# Altium PCB PCB1.PcbDoc (part 1 of 4)
Units mm, origin at the board's own origin, x right, y up, seen from the top; angles counter-clockwise.
Board outline 100.03 x 99.98 mm, 4 copper layers (Top Layer, Layer 2, Layer 3, Bottom Layer), stack 0.603 mm thick; 139 components, 135 nets, 1369 pads, 401 vias.
Unrouted connection lines stored in the file: 1.
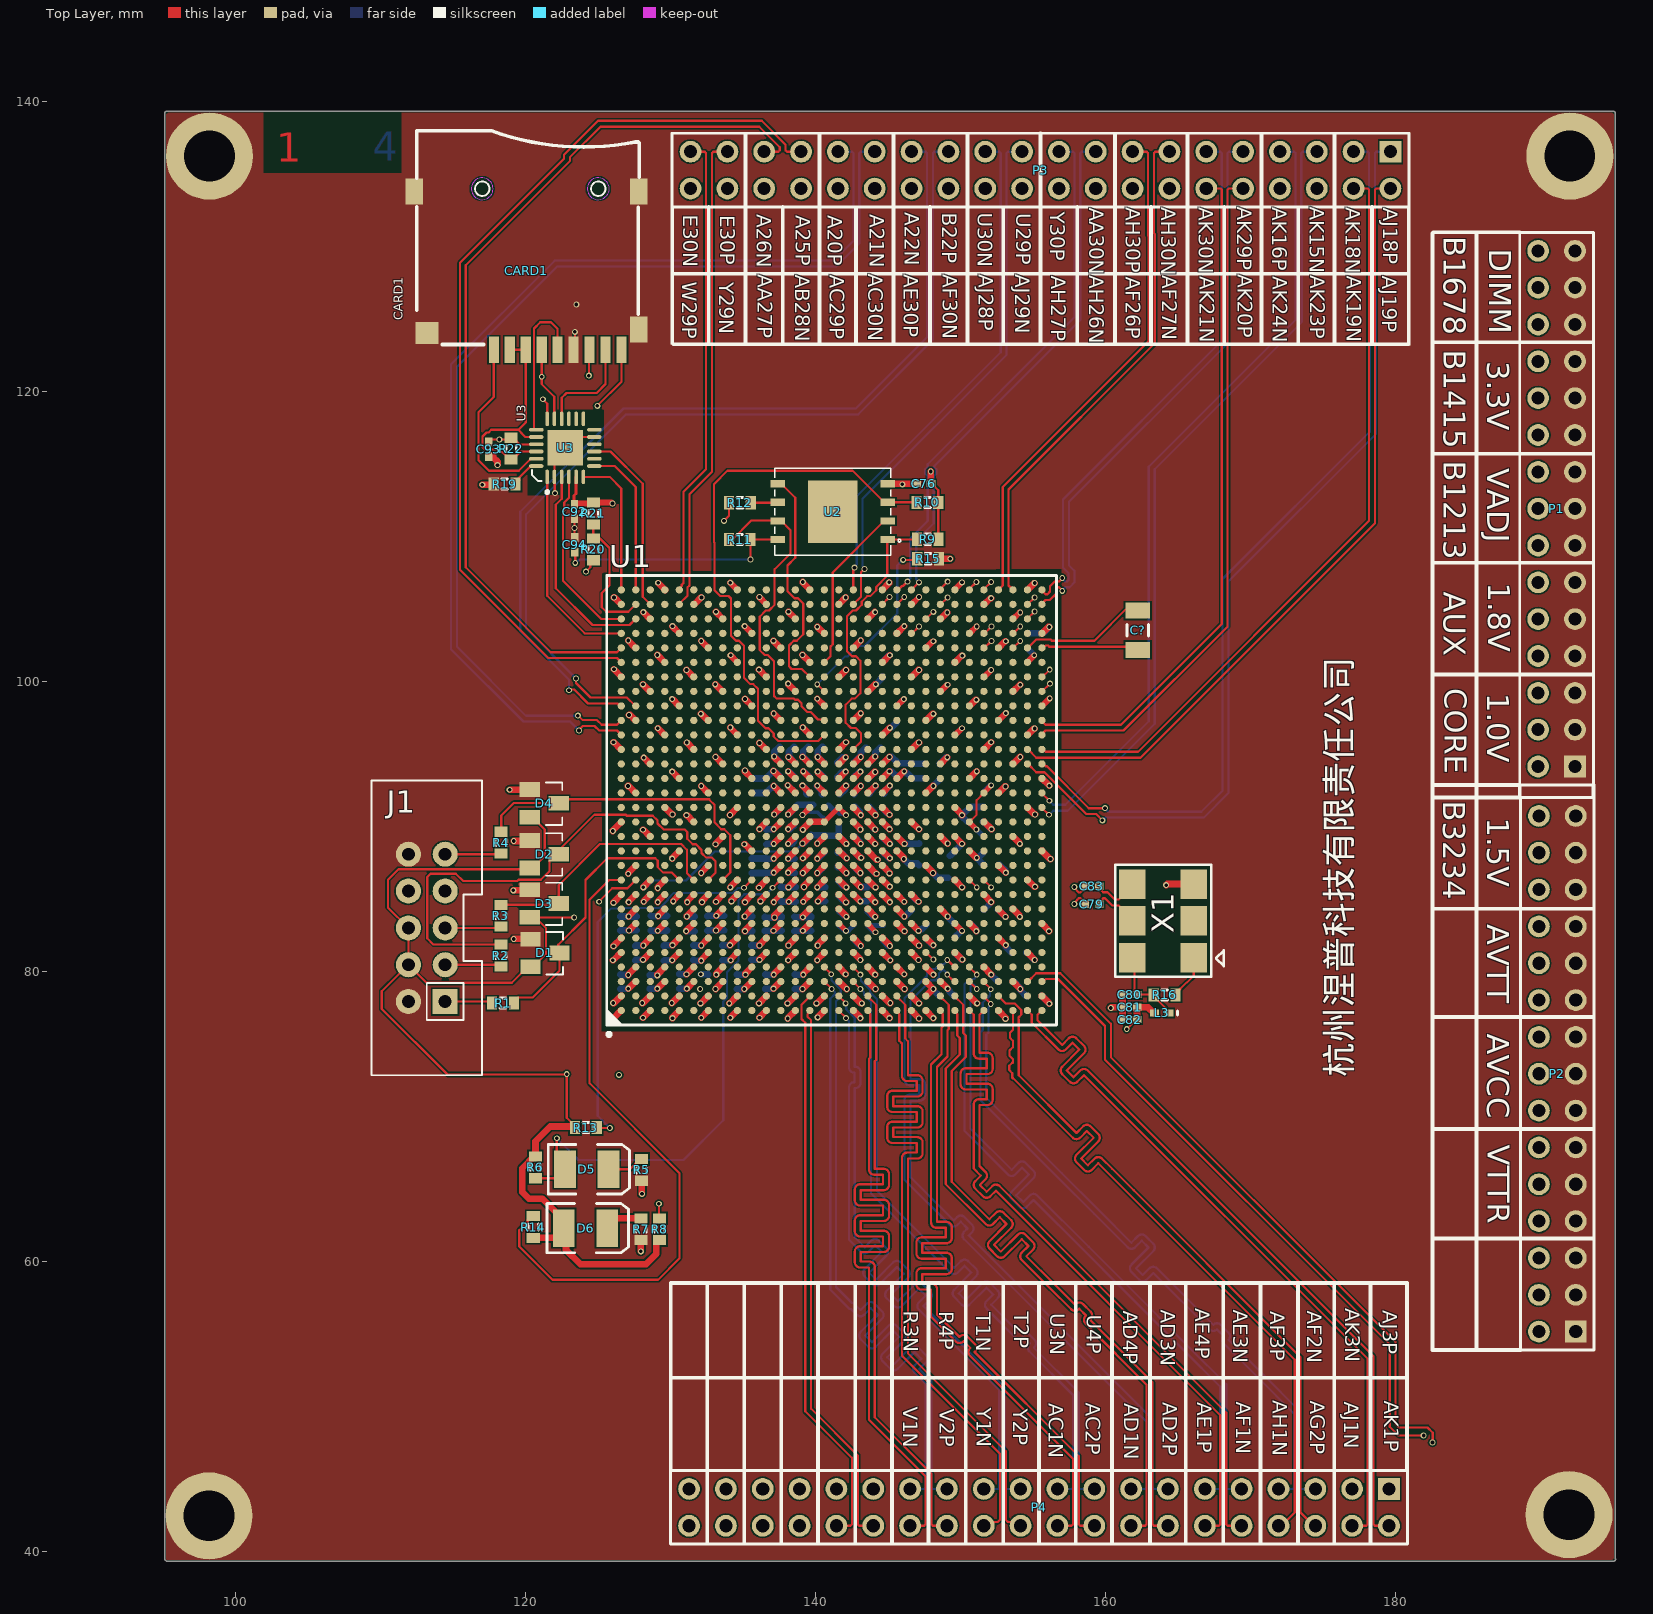
[diagram p0: Top Layer view]
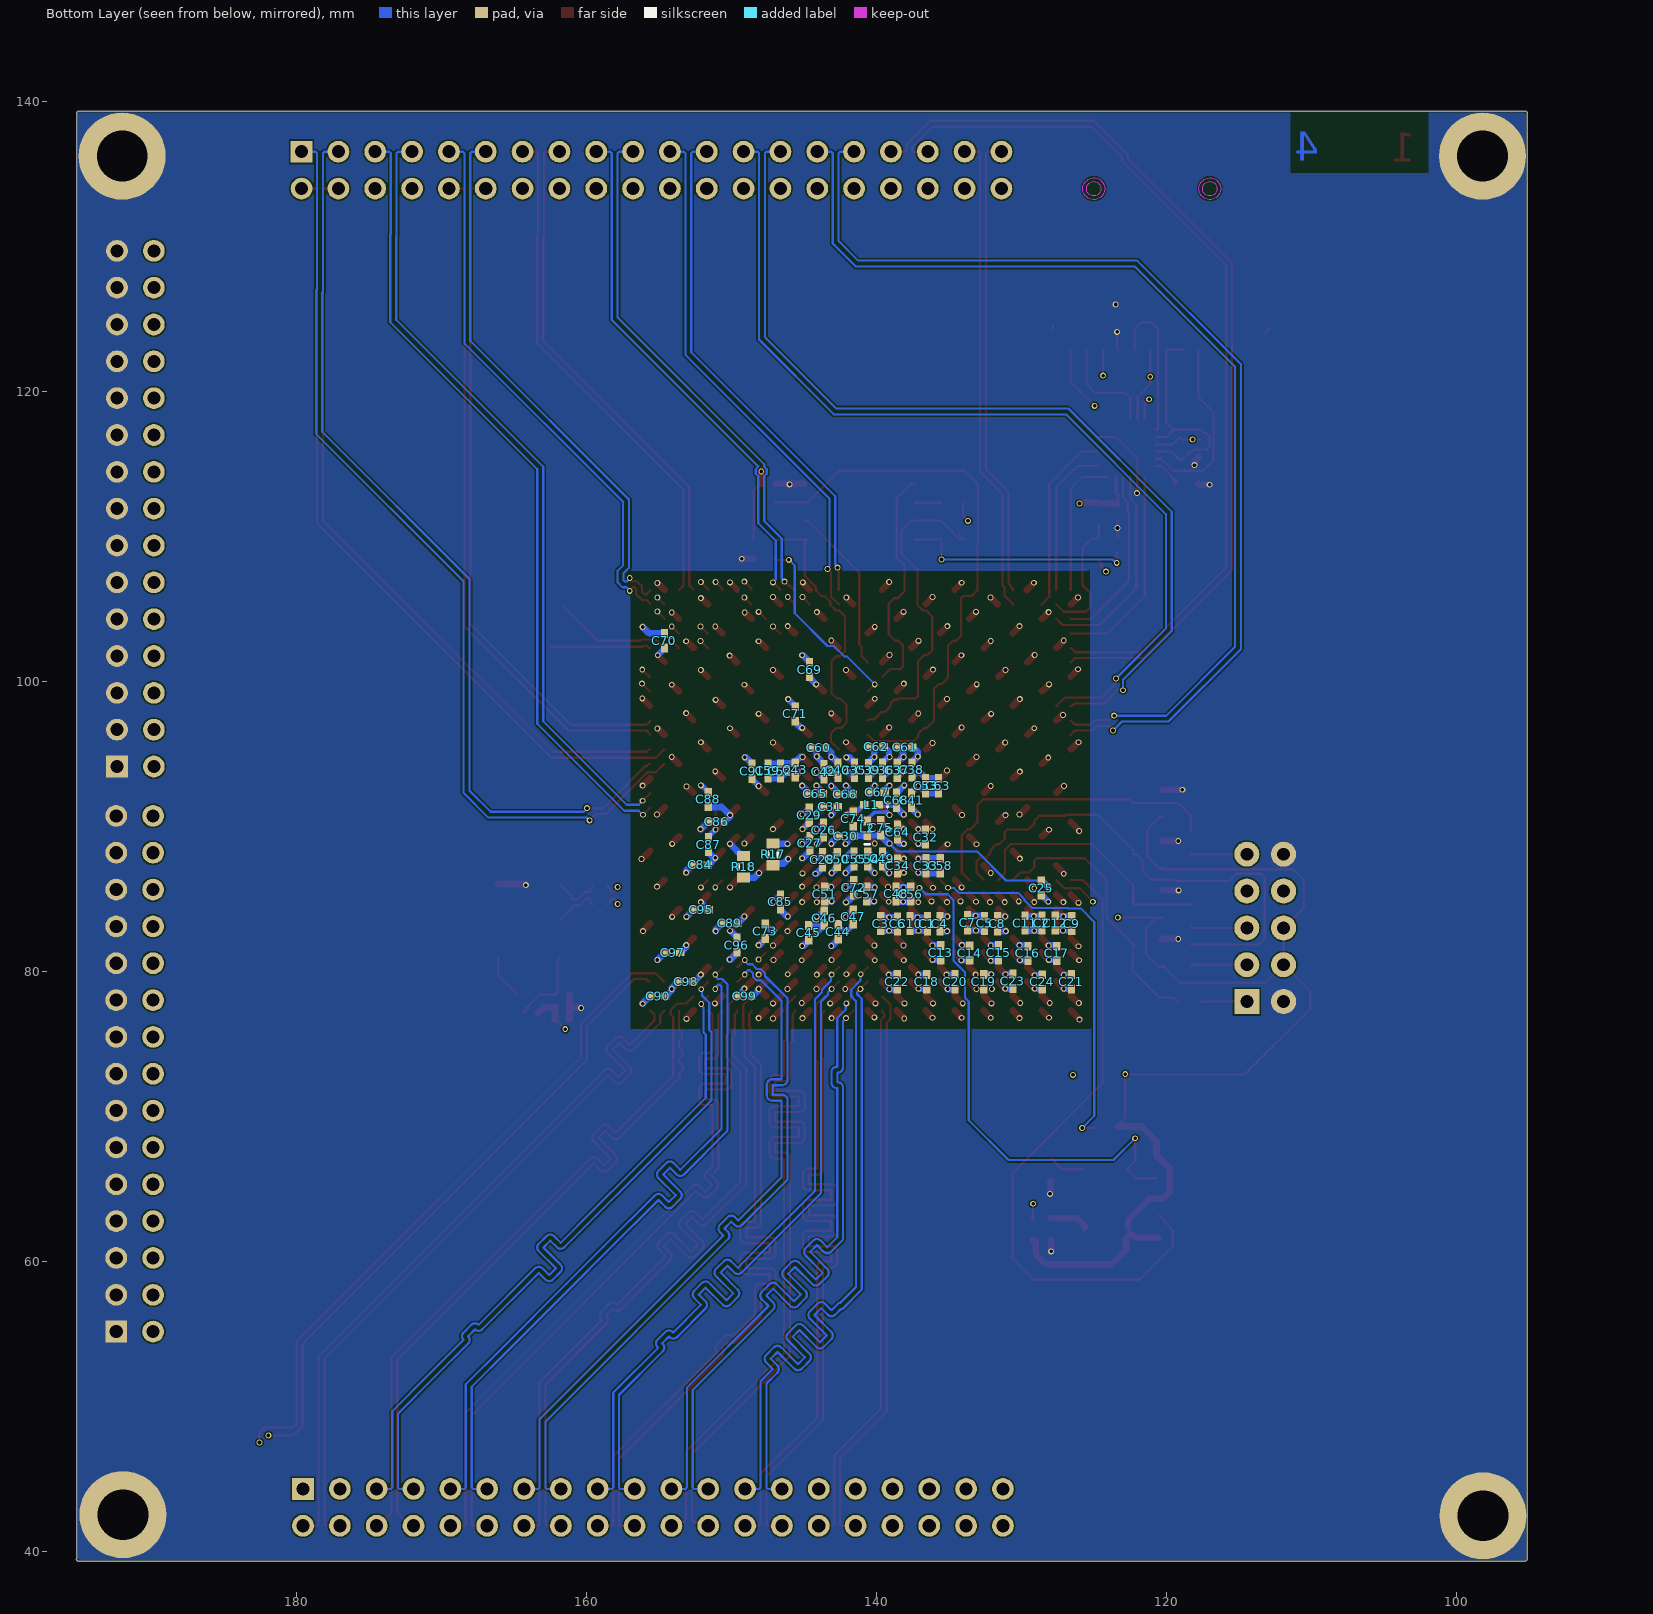
[diagram p1: Bottom Layer view, seen from below]
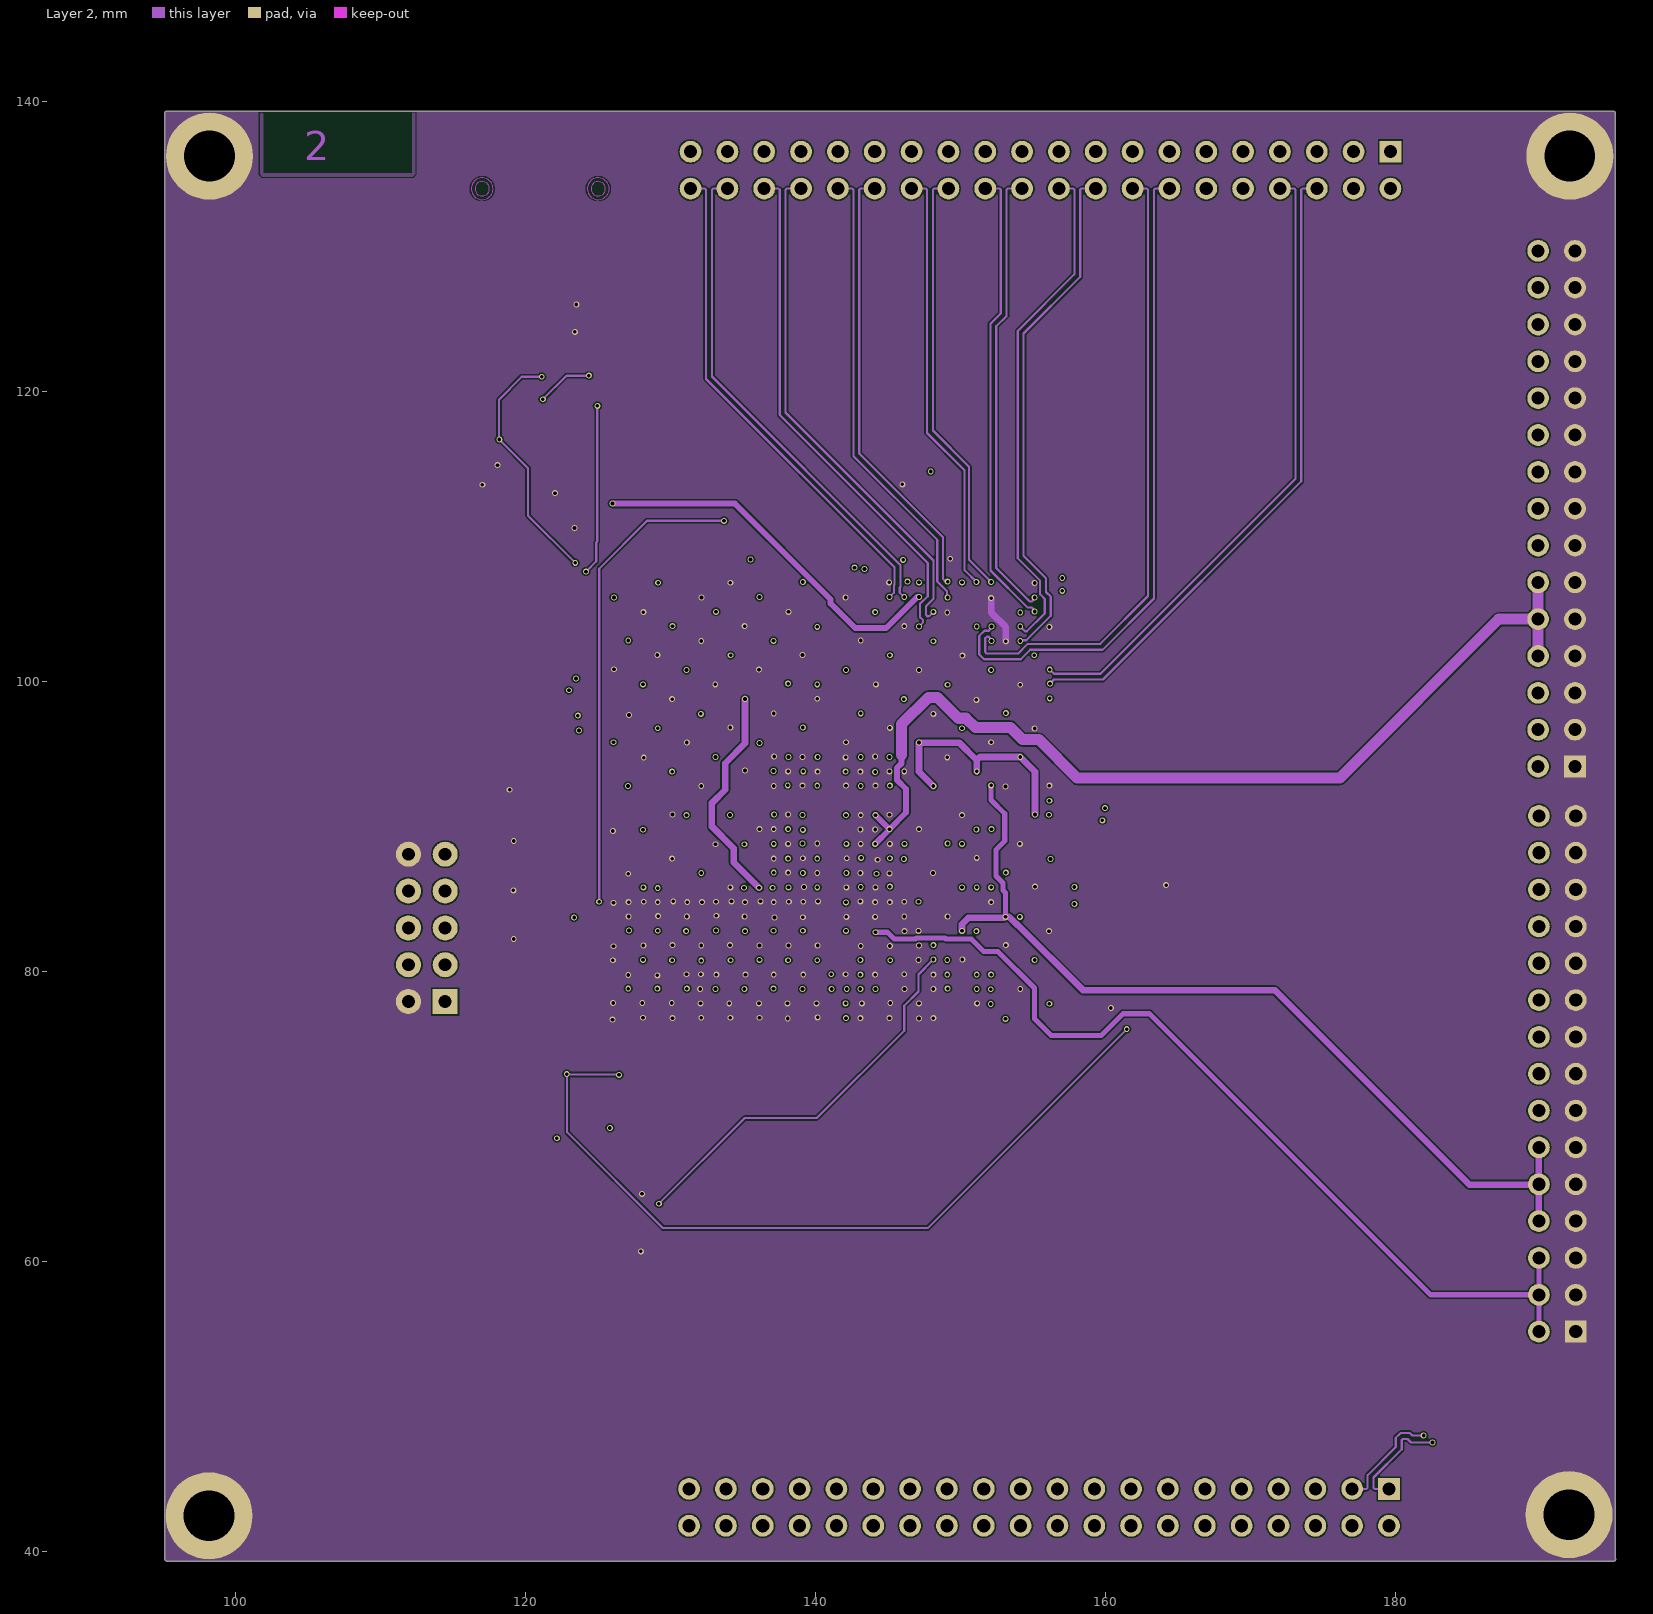
[diagram p2: Layer 2]
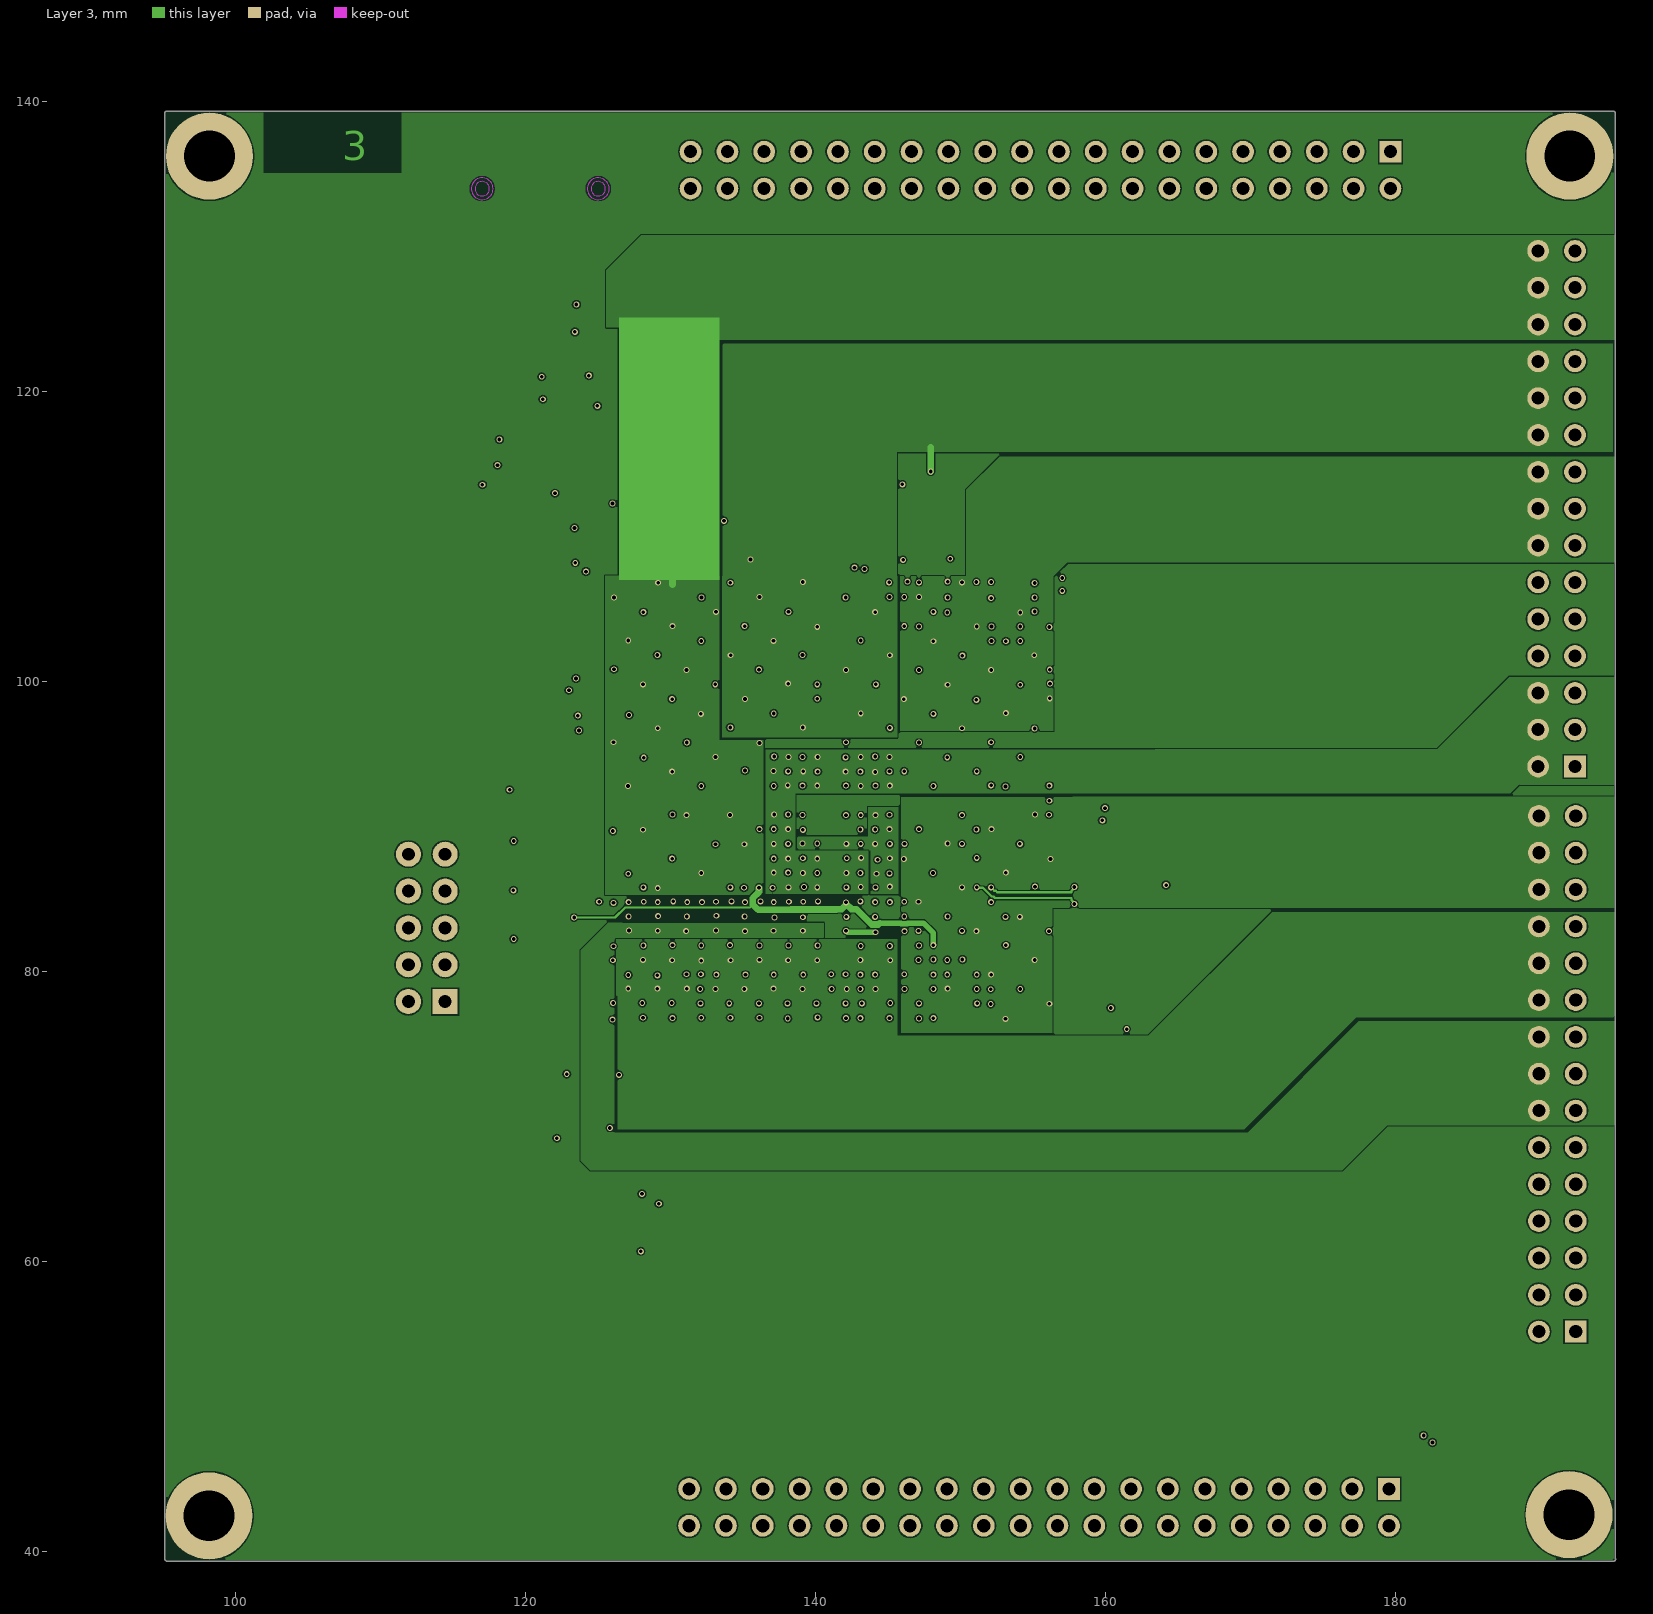
[diagram p3: Layer 3]

## Layer stack, top to bottom
Top Solder: solder mask 0.0102, Solder Resist, Dk 3.5
Top Layer: signal copper 0.0356
Dielectric 2: prepreg 0.0711, PP-006, Dk 4.1
Layer 2: signal copper 0.035
Dielectric 1: dielectric 0.32, FR-4, Dk 4.8
Layer 3: signal copper 0.035
Dielectric 3: prepreg 0.0711, PP-006, Dk 4.1
Bottom Layer: signal copper 0.0356
Bottom Solder: solder mask 0.0102, Solder Resist, Dk 3.5

## Board outline
95.148,39.497 ccw(c95.275,39.497) 95.199,39.395 ccw(c95.301,39.472) 95.301,39.344 195.047,39.344 ccw(c195.047,39.472) 195.174,39.472 ccw(c195.047,39.472) 195.149,39.548 195.149,139.192 ccw(c195.021,139.192) 195.021,139.319 95.275,139.319 ccw(c95.275,139.192) 95.148,139.192

## Design rules (kind name [scope] priority, off if disabled: settings)
Clearance Clearance_1 [All] p1: gap=0.102 ignorepadtopadclearanceinfootprint=TRUE
Clearance [All] p2: gap=0.102 ignorepadtopadclearanceinfootprint=TRUE
DiffPairsRouting [All] p1: maxlimit=0.254 minlimit=0.254 mostfreqgap=0.254 toplayer_minwidth=0.152 toplayer_maxwidth=0.381 toplayer_prefwidth=0.381 midlayer1_minwidth=0.152 midlayer1_maxwidth=0.381 midlayer1_prefwidth=0.381 midlayer2_minwidth=0.152 midlayer2_maxwidth=0.381 midlayer2_prefwidth=0.381 bottomlayer_minwidth=0.152 bottomlayer_maxwidth=0.381 bottomlayer_prefwidth=0.381 maxuncoupledlength=12.7
FanoutControl Fanout_BGA [All] p1: bgadir=Out bgaviamode=Centered fanoutstyle=Auto fanoutdirection=Alternating viagrid=0.025 // Fanout_BGA (Default Rule)
HoleToHoleClearance [All] p1: gap=0.102 allowstackedmicrovias=TRUE
MinimumSolderMaskSliver [All] p1: minsoldermaskwidth=0.102
PlaneClearance [All] p1: clearance=0.102
PlaneConnect [All] p1: planeconnectstyle=Direct reliefexpansion=0.508 reliefentries=4 reliefconductorwidth=0.254 reliefairgap=0.254
PolygonConnect [All] p1: connectstyle=Direct reliefconductorwidth=0.254 reliefentries=4 polygonreliefangle="90 Angle" airgapwidth=0.254
RoomDefinition SD&UART&Sensor [InComponentClass('SD&UART&Sensor')] p1 off: confinementstyle=ConfineIn formatcopy=TRUE lockcomponents=FALSE outline 0,0 50.8,0 50.8,25.4 0,25.4
RoomDefinition "PAGE15 FLASH" [InComponentClass('PAGE15 FLASH')] p2 off: confinementstyle=ConfineIn formatcopy=TRUE lockcomponents=FALSE outline 0,0 50.8,0 50.8,25.4 0,25.4
RoomDefinition IO [InComponentClass('IO')] p3 off: confinementstyle=ConfineIn formatcopy=TRUE lockcomponents=FALSE outline 0,0 50.8,0 50.8,25.4 0,25.4
RoomDefinition INPUT [InComponentClass('INPUT')] p4 off: confinementstyle=ConfineIn formatcopy=TRUE lockcomponents=FALSE outline 0,0 50.8,0 50.8,25.4 0,25.4
RoomDefinition "FPGA Power" [InComponentClass('FPGA Power')] p5 off: confinementstyle=ConfineIn formatcopy=TRUE lockcomponents=FALSE outline 0,0 50.8,0 50.8,25.4 0,25.4
RoomDefinition CLOCK [InComponentClass('CLOCK')] p6 off: confinementstyle=ConfineIn formatcopy=TRUE lockcomponents=FALSE outline 0,0 50.8,0 50.8,25.4 0,25.4
RoomDefinition BANK34 [InComponentClass('BANK34')] p7 off: confinementstyle=ConfineIn formatcopy=TRUE lockcomponents=FALSE outline 0,0 50.8,0 50.8,25.4 0,25.4
RoomDefinition BANK32-33 [InComponentClass('BANK32-33')] p8 off: confinementstyle=ConfineIn formatcopy=TRUE lockcomponents=FALSE outline 0,0 50.8,0 50.8,25.4 0,25.4
RoomDefinition BANK14-15 [InComponentClass('BANK14-15')] p9 off: confinementstyle=ConfineIn formatcopy=TRUE lockcomponents=FALSE outline 0,0 50.8,0 50.8,25.4 0,25.4
RoomDefinition BANK12-13 [InComponentClass('BANK12-13')] p10 off: confinementstyle=ConfineIn formatcopy=TRUE lockcomponents=FALSE outline 0,0 50.8,0 50.8,25.4 0,25.4
RoomDefinition BANK0 [InComponentClass('BANK0')] p11 off: confinementstyle=ConfineIn formatcopy=TRUE lockcomponents=FALSE outline 0,0 50.8,0 50.8,25.4 0,25.4
RoutingCorners [All] p1: cornerstyle=45-Degree minsetback=0.102 maxsetback=2.54
RoutingVias [All] p1: holewidth=0.711 width=1.27 viastyle="Through Hole" minholewidth=0.102 minwidth=0.102 maxholewidth=2.54 maxwidth=2.54
SilkToSilkClearance [All] p1: silktosilkclearance=0.102
SilkToSolderMaskClearance [IsPad] p1: minsilkscreentomaskgap=0.102 clearancetoexposedcopper=TRUE
SolderMaskExpansion [All] p1: expansion=0.102
UnRoutedNet [All] p1: checkbadconnections=TRUE
Width [All] p1: maxlimit=2.54 minlimit=0.152 preferedwidth=0.152
20 further rules are at their usual default settings.

## Classes and differential pairs
component class BANK12-13: C?
component class BANK34: C95 C96 C97 C98 C99
component class SD&UART&Sensor: C92 C93 C94 CARD1 R19 R20 R21 R22 U3
component class BANK32-33: C84 C85 C86 C87 C88 C89 C90 C91 R17 R18
component class IO: P3 P4
component class INPUT: P1 P2
component class CLOCK: C79 C80 C81 C82 C83 L3 R16 X1
component class BANK14-15: R15
component class "PAGE15 FLASH": C76 R9 R10 R11 U2
component class "FPGA Power": C1 C2 C3 C4 C5 C6 C7 C8 C9 C10 C11 C12 C13 C14 C15 C16 C17 C18 C19 C20 C21 C22 C23 C24 C25 C26 C27 C28 C29 C30 C31 C32 C33 C34 C35 C36 C37 C38 C39 C40 C41 C42 C43 C44 C45 C46 C47 C48 C49 C50 C51 C52 C53 C54 C55 C56 C57 C58 C59 C60 C61 C62 C63 C64 C65 C66 C67 C68 C69 C70 C71 C72 C73 C74 C75 L2
component class BANK0: D1 D2 D3 D4 D5 D6 J1 L1 R1 R2 R3 R4 R5 R6 R7 R8 R12 R13 R14
differential pair M1: +"" -""
differential pair P1: +P1_P -P1_N
differential pair R3: +R3_P -R3_N
differential pair T1: +T1_P -T1_N
differential pair U3: +U3_P -U3_N
differential pair V1: +V1_P -V1_N
differential pair Y1: +Y1_P -Y1_N
differential pair AJ2: +AJ2_P -AJ2_N
differential pair AD3: +AD3_P -AD3_N
differential pair AK3: +AK3_P -AK3_N
differential pair AE3: +AE3_P -AE3_N
differential pair AF2: +AF2_P -AF2_N
differential pair AD1: +AD1_P -AD1_N
differential pair AC1: +AC1_P -AC1_N
differential pair AF1: +AF1_P -AF1_N
differential pair AH1: +AH1_P -AH1_N
differential pair AK1: +AK1_P -AK1_N
differential pair A21: +A21_P -A21_N
differential pair A22: +A22_P -A22_N
differential pair U30: +U30_P -U30_N
differential pair AK30: +AK30_P -AK30_N
differential pair A26: +A26_P -A26_N
differential pair E30: +E30_P -E30_N
differential pair AA30: +AA30_P -AA30_N
differential pair AH_30: +AH_30_P -AH_30_N
differential pair AK19: +AK19_P -AK19_N
differential pair AK18: +AK18_P -AK18_N
differential pair AK15: +AK15_P -AK15_N
differential pair X13: +X13_P -X13_N
differential pair X12: +X12_P -X12_N
differential pair X11: +X11_P -X11_N
differential pair X10: +X10_P -X10_N
differential pair X8: +X8_P -X8_N
differential pair X7: +X7_P -X7_N
differential pair X6: +X6_P -X6_N
differential pair X5: +X5_P -X5_N
differential pair X4: +X4_P -X4_N
differential pair X3: +X3_P -X3_N
differential pair X2: +X2_P -X2_N
differential pair X1: +X1_P -X1_N
differential pair SYS_CLK: +SYS_CLK_P -SYS_CLK_N

## Components (designator, comment, footprint, x,y, rotation, side; value= is the part's Value field where it differs from the comment)
C1 "Cap Semi" 0402 136.5,83.287 r90 bottom value=4.7uF
C2 "Cap Semi" 0402 128.6,83.337 r270 bottom value=4.7uF
C3 "Cap Semi" 0402 139.725,83.304 r270 bottom value=1uF
C4 "Cap Semi" 0402 135.636,83.287 r270 bottom value=1uF
C5 "Cap Semi" 0402 132.563,83.312 r270 bottom value=0.47uF
C6 "Cap Semi" 0402 138.557,83.279 r270 bottom value=0.47uF
C7 "Cap Semi" 0402 133.731,83.355 r270 bottom value=0.47uF
C8 "Cap Semi" 0402 131.674,83.287 r270 bottom value=0.47uF
C9 "Cap Semi" 0402 126.543,83.304 r270 bottom value=0.022uF
C10 "Cap Semi" 0402 137.693,83.304 r270 bottom value=0.022uF
C11 "Cap Semi" 0402 129.769,83.337 r270 bottom value=0.022uF
C12 "Cap Semi" 0402 127.686,83.337 r270 bottom value=0.022uF
C13 "Cap Semi" 0402 135.585,81.297 r90 bottom value=4.7uF
C14 "Cap Semi" 0402 133.579,81.272 r270 bottom value=4.7uF
C15 "Cap Semi" 0402 131.597,81.297 r270 bottom value=1uF
C16 "Cap Semi" 0402 129.565,81.247 r270 bottom value=1uF
C17 "Cap Semi" 0402 127.584,81.247 r270 bottom value=0.47uF
C18 "Cap Semi" 0402 136.55,79.291 r270 bottom value=0.47uF
C19 "Cap Semi" 0402 132.613,79.291 r270 bottom value=0.47uF
C20 "Cap Semi" 0402 134.595,79.291 r270 bottom value=0.47uF
C21 "Cap Semi" 0402 126.568,79.291 r270 bottom value=0.022uF
C22 "Cap Semi" 0402 138.582,79.291 r270 bottom value=0.022uF
C23 "Cap Semi" 0402 130.607,79.327 r270 bottom value=0.022uF
C24 "Cap Semi" 0402 128.575,79.281 r270 bottom value=0.022uF
C25 "Cap Semi" 0402 128.651,85.75 r90 bottom value=47uF
C26 "Cap Semi" 0402 143.662,89.756 r270 bottom value=47uF
C27 "Cap Semi" 0402 144.602,88.832 r270 bottom value=47uF
C28 "Cap Semi" 0402 143.739,87.706 r270 bottom value=4.7uF
C29 "Cap Semi" 0402 144.653,90.772 r270 bottom value=4.7uF
C30 "Cap Semi" 0402 142.121,89.332 r180 bottom value=47uF
C31 "Cap Semi" 0402 143.188,91.364 r0 bottom value=4.7uF
C32 "Cap Semi" 0402 136.627,89.273 r270 bottom value=100uF
C33 "Cap Semi" 0402 136.601,87.292 r270 bottom value=100uF
C34 "Cap Semi" 0402 138.557,87.274 r90 bottom value=100uF
C35 "Cap Semi" 0402 141.529,93.878 r270 bottom value=4.7uF
C36 "Cap Semi" 0402 139.598,93.87 r270 bottom value=4.7uF
C37 "Cap Semi" 0402 138.582,93.878 r90 bottom value=4.7uF
C38 "Cap Semi" 0402 137.566,93.896 r270 bottom value=4.7uF
C39 "Cap Semi" 0402 140.564,93.861 r90 bottom value=4.7uF
C40 "Cap Semi" 0402 142.672,93.87 r90 bottom value=4.7uF
C41 "Cap Semi" 0402 137.592,91.804 r270 bottom value=4.7uF
C42 "Cap Semi" 0402 143.637,93.777 r270 bottom value=4.7uF
C43 "Cap Semi" 0402 145.618,93.896 r90 bottom value=4.7uF
C44 "Cap Semi" 0402 142.646,82.736 r90 bottom value=4.7uF
C45 "Cap Semi" 0402 144.678,82.669 r90 bottom value=4.7uF
C46 "Cap Semi" 0402 143.612,83.685 r270 bottom value=4.7uF
C47 "Cap Semi" 0402 141.605,83.761 r270 bottom value=4.7uF
C48 "Cap Semi" 0402 138.659,85.344 r90 bottom value=100uF
C49 "Cap Semi" 0402 139.598,87.757 r270 bottom value=100uF
C50 "Cap Semi" 0402 142.723,87.732 r90 bottom value=100uF
C51 "Cap Semi" 0402 143.586,85.336 r90 bottom value=100uF
C52 "Cap Semi" 0402 146.634,93.82 r90 bottom value=100uF
C53 "Cap Semi" 0402 136.627,92.804 r90 bottom value=100uF
C54 "Cap Semi" 0402 140.614,87.749 r90 bottom value=100uF
C55 "Cap Semi" 0402 141.554,87.749 r270 bottom value=100uF
C56 "Cap Semi" 0402 137.643,85.336 r90 bottom value=100uF
C57 "Cap Semi" 0402 140.691,85.336 r90 bottom value=100uF
C58 "Cap Semi" 0402 135.611,87.292 r270 bottom value=100uF
C59 "Cap Semi" 0402 147.498,93.828 r90 bottom value=4.7uF
C60 "Cap Semi" 0402 144.001,95.428 r180 bottom value=4.7uF
C61 "Cap Semi" 0402 138.057,95.479 r0 bottom value=4.7uF
C62 "Cap Semi" 0402 140.022,95.504 r0 bottom value=4.7uF
C63 "Cap Semi" 0402 135.738,92.804 r90 bottom value=4.7uF
C64 "Cap Semi" 0402 138.557,89.611 r90 bottom value=4.7uF
C65 "Cap Semi" 0402 144.229,92.253 r0 bottom value=4.7uF
C66 "Cap Semi" 0402 142.172,92.227 r0 bottom value=4.7uF
C67 "Cap Semi" 0402 139.954,92.354 r0 bottom value=4.7uF
C68 "Cap Semi" 0402 138.633,91.804 r90 bottom value=4.7uF
C69 "Cap Semi" 0402 144.628,100.813 r90 bottom value=47uF
C70 "Cap Semi" 0402 154.635,102.811 r270 bottom value=100uF
C71 "Cap Semi" 0402 145.618,97.757 r90 bottom value=100uF
C72 "Cap Semi" 0402 141.58,85.776 r270 bottom value=100uF
C73 "Cap Semi" 0402 147.676,82.779 r270 bottom value=100uF
C74 "Cap Semi" 0402 141.605,90.518 r270 bottom value=0.1uF
C75 "Cap Semi" 0402 139.725,89.908 r270 bottom value=470nF
C76 "Cap Semi" 0402 147.472,113.64 r0 top value=0.1uF
C79 "Cap Semi" 0402 159.072,84.633 r180 top value=0.1uF
C80 "Cap Semi" 0402 161.679,78.41 r0 top value=0.1uF
C81 "Cap Semi" 0402 161.679,77.546 r0 top value=0.1uF
C82 "Cap Semi" 0402 161.679,76.683 r0 top value=4.7uF
C83 "Cap Semi" 0402 159.055,85.877 r180 top value=0.1uF
C84 "Cap Semi" 0402 152.154,87.351 r0 bottom value=100uF
C85 "Cap Semi" 0402 146.634,84.793 r90 bottom value=0.1uF
C86 "Cap Semi" 0402 151.036,90.322 r0 bottom value=0.1uF
C87 "Cap Semi" 0402 151.587,88.756 r90 bottom value=0.1uF
C88 "Cap Semi" 0402 151.613,91.864 r90 bottom value=0.1uF
C89 "Cap Semi" 0402 150.122,83.312 r0 bottom value=100uF
C90 "Cap Semi" 0402 155.075,78.308 r0 bottom value=0.1uF
C91 "Cap Semi" 0402 148.59,93.81 r270 bottom value=0.1uF
C92 "Cap Semi" 0402 123.393,111.709 r90 top value=0.1uF
C93 "Cap Semi" 0402 117.475,116.013 r90 top value=0.1uF
C94 "Cap Semi" 0402 123.419,109.423 r90 top value=0.1uF
C95 "Cap Semi" 0402 152.078,84.252 r180 bottom value=0.1uF
C96 "Cap Semi" 0402 149.631,81.821 r270 bottom value=0.1uF
C97 "Cap Semi" 0402 154.059,81.305 r0 bottom value=0.1uF
C98 "Cap Semi" 0402 153.145,79.299 r180 bottom value=0.1uF
C99 "Cap Semi" 0402 149.106,78.308 r0 bottom value=100uF
C? "Cap Semi" C1206 162.23,103.53 r90 top value=100pF
CARD1 "TF-01A" MICRO_SD 120.167,129.997 r180 top
D1 "BAT5S" SOT-23 121.308,81.244 r180 top
D2 "BAT5S" SOT-23 121.257,88.051 r180 top
D3 "BAT5S" SOT-23 121.257,84.647 r180 top
D4 "BAT5S" SOT-23 121.257,91.556 r180 top
D5 "LED3" 3.5X2.8X1.9 124.231,66.37 r0 top
D6 "LED3" 3.5X2.8X1.9 124.155,62.306 r0 top
J1 "JTAG-10" JTAG-10 113.208,83.007 r90 top
L1 "Inductor" 0402-A 140.36,91.491 r0 bottom value=120Ohm@100MHz
L2 "Inductor" 0402-A 140.64,89.873 r90 bottom value=1200hm
L3 "Inductor" 0402-A 163.881,77.14 r180 top value=1200hm
P1 "Header 15X2A" HDR2X15_CEN 192.38,94.132 r90 top
P2 "Header 15X2A" HDR2X15_CEN 192.43,55.169 r90 top
P3 "Header 20X2" HDR2X20 179.654,136.525 r180 top
P4 "Header 20X2" HDR2X20 179.553,44.323 r180 top
R1 "Res3" J1-0603 118.466,77.826 r180 top value=33R
R2 "Res3" J1-0603 118.313,81.102 r270 top value=33R
R3 "Res3" J1-0603 118.313,83.845 r270 top value=33R
R4 "Res3" J1-0603 118.339,88.888 r270 top value=33R
R5 "Res3" J1-0603 128.016,66.319 r90 top value=220R
R6 "Res3" J1-0603 120.701,66.497 r90 top value=330R
R7 "Res3" J1-0603 127.991,62.23 r90 top value=220R
R8 "Res3" J1-0603 129.261,62.23 r90 top value=1K
R9 "Res3" J1-0603 147.752,109.804 r0 top value=4.7K
R10 "Res3" J1-0603 147.726,112.344 r0 top value=4.7K
R11 "Res3" J1-0603 134.784,109.779 r0 top value=4.7K
R12 "Res3" J1-0603 134.798,112.319 r0 top value=33R
R13 "Res3" J1-0603 124.181,69.24 r180 top value=4.7k
R14 "Res3" J1-0603 120.548,62.382 r270 top value=4.7k
R15 "Res3" J1-0603 147.777,108.458 r180 top value=1k
R16 "Res3" J1-0603 164.084,78.384 r180 top value=4.7k
R17 "Res3" J1-0603 147.142,88.074 r270 bottom value=80R
R18 "Res3" J1-0603 149.174,87.224 r90 bottom value=80R
R19 "Res3" J1-0603 118.574,113.609 r0 top value=4.7k
R20 "Res3" J1-0603 124.689,109.105 r270 top value=330R
R21 "Res3" J1-0603 124.689,111.582 r270 top value=100k
R22 "Res3" J1-0603 119.024,116.053 r270 top value=4.7k
U1 "XC7K325T-2FBG900I" FBG900 125.586,75.391 r90 top
U2 "N25Q128" WSON-8_L6.0-W8.0-P1.27-BL-EP 141.199,111.709 r90 top
U3 "TXS02612RTWR" QFN24_RTW 122.678,116.103 r90 top
X1 "晶振" OSC6-5X7 164.008,83.515 r90 top

## Footprints (in the part's own frame and the unit in brackets; to place one, negate y for a bottom-side part, rotate by r counter-clockwise, add the part's x,y. Pads: shape width x height; smd on the part's side, far side on the other; paste and mask are expansions set on the pad)
3.5X2.8X1.9 [mm] "SM LED; 2 C-Bend Leads; Body 3.5 x 2.8 x 1.9 mm, inc leads (LxWxH typ)"
  rect 1.5x2.6 smd: 1(-1.5,0) 2(1.5,0)
  silkscreen extent -2.65,-1.7 2.95,1.7
0402 [mm] "Chip Capacitor, Body 1.0x0.5mm, IPC High Density"
  rect 0.6x0.5 smd: 1(-0.5,0) 2(0.5,0)
  body extent -0.55,-0.3 0.55,0.3, height 1.3
0402-A [mm] "Chip Inductor, Body 1.0x0.5mm, IPC High Density"
  rect 0.6x0.5 smd: 1(-0.5,0) 2(0.5,0)
  silkscreen extent -1.1,-0.15 -1.1,0.15, body extent -0.55,-0.3 0.55,0.3, height 0.55
C1206 [mm] "Chip Capacitor, Body 3.2x1.6mm, IPC High Density"
  rect 1.1x1.7 smd: 1(-1.35,0) 2(1.35,0)
  silkscreen extent -0.4,-0.75 0.4,0.75, body extent -1.7,-0.9 1.7,0.9, height 1.3
FBG900 [mm]
  round 0.5 smd: A1(1.923,-1.034) A2(2.923,-1.034) A3(3.923,-1.034) A4(4.923,-1.034) A5(5.923,-1.034) A6(6.923,-1.034) A7(7.923,-1.034) A8(8.923,-1.034) A9(9.923,-1.034) A10(10.923,-1.034) A11(11.923,-1.034) A12(12.923,-1.034) A13(13.923,-1.034) A14(14.923,-1.034) A15(15.923,-1.034) A16(16.923,-1.034) A17(17.923,-1.034) A18(18.923,-1.034) A19(19.923,-1.034) A20(20.923,-1.034) A21(21.923,-1.034) A22(22.923,-1.034) A23(23.923,-1.034) A24(24.923,-1.034) A25(25.923,-1.034) A26(26.923,-1.034) A27(27.923,-1.034) A28(28.923,-1.034) A29(29.923,-1.034) A30(30.923,-1.034) AA1(1.923,-21.034) AA2(2.923,-21.034) AA3(3.923,-21.034) AA4(4.923,-21.034) AA5(5.923,-21.034) AA6(6.923,-21.034) AA7(7.923,-21.034) AA8(8.923,-21.034) AA9(9.923,-21.034) AA10(10.923,-21.034) AA11(11.923,-21.034) AA12(12.923,-21.034) AA13(13.923,-21.034) AA14(14.923,-21.034) AA15(15.923,-21.034) AA16(16.923,-21.034) AA17(17.923,-21.034) AA18(18.923,-21.034) AA19(19.923,-21.034) AA20(20.923,-21.034) AA21(21.923,-21.034) AA22(22.923,-21.034) AA23(23.923,-21.034) AA24(24.923,-21.034) AA25(25.923,-21.034) AA26(26.923,-21.034) AA27(27.923,-21.034) AA28(28.923,-21.034) AA29(29.923,-21.034) AA30(30.923,-21.034) AB1(1.923,-22.034) AB2(2.923,-22.034) AB3(3.923,-22.034) AB4(4.923,-22.034) AB5(5.923,-22.034) AB6(6.923,-22.034) AB7(7.923,-22.034) AB8(8.923,-22.034) AB9(9.923,-22.034) AB10(10.923,-22.034) AB11(11.923,-22.034) AB12(12.923,-22.034) AB13(13.923,-22.034) AB14(14.923,-22.034) AB15(15.923,-22.034) AB16(16.923,-22.034) AB17(17.923,-22.034) AB18(18.923,-22.034) AB19(19.923,-22.034) AB20(20.923,-22.034) AB21(21.923,-22.034) AB22(22.923,-22.034) AB23(23.923,-22.034) AB24(24.923,-22.034) AB25(25.923,-22.034) AB26(26.923,-22.034) AB27(27.923,-22.034) AB28(28.923,-22.034) AB29(29.923,-22.034) AB30(30.923,-22.034) AC1(1.923,-23.034) AC2(2.923,-23.034) AC3(3.923,-23.034) AC4(4.923,-23.034) AC5(5.923,-23.034) AC6(6.923,-23.034) AC7(7.923,-23.034) AC8(8.923,-23.034) AC9(9.923,-23.034) AC10(10.923,-23.034) AC11(11.923,-23.034) AC12(12.923,-23.034) AC13(13.923,-23.034) AC14(14.923,-23.034) AC15(15.923,-23.034) AC16(16.923,-23.034) AC17(17.923,-23.034) AC18(18.923,-23.034) AC19(19.923,-23.034) AC20(20.923,-23.034) AC21(21.923,-23.034) AC22(22.923,-23.034) AC23(23.923,-23.034) AC24(24.923,-23.034) AC25(25.923,-23.034) AC26(26.923,-23.034) AC27(27.923,-23.034) AC28(28.923,-23.034) AC29(29.923,-23.034) AC30(30.923,-23.034) AD1(1.923,-24.034) AD2(2.923,-24.034) AD3(3.923,-24.034) AD4(4.923,-24.034) AD5(5.923,-24.034) AD6(6.923,-24.034) AD7(7.923,-24.034) AD8(8.923,-24.034) AD9(9.923,-24.034) AD10(10.923,-24.034) AD11(11.923,-24.034) AD12(12.923,-24.034) AD13(13.923,-24.034) AD14(14.923,-24.034) AD15(15.923,-24.034) AD16(16.923,-24.034) AD17(17.923,-24.034) AD18(18.923,-24.034) AD19(19.923,-24.034) AD20(20.923,-24.034) AD21(21.923,-24.034) AD22(22.923,-24.034) AD23(23.923,-24.034) AD24(24.923,-24.034) AD25(25.923,-24.034) AD26(26.923,-24.034) AD27(27.923,-24.034) AD28(28.923,-24.034) AD29(29.923,-24.034) AD30(30.923,-24.034) AE1(1.923,-25.034) AE2(2.923,-25.034) AE3(3.923,-25.034) AE4(4.923,-25.034) AE5(5.923,-25.034) AE6(6.923,-25.034) AE7(7.923,-25.034) AE8(8.923,-25.034) AE9(9.923,-25.034) AE10(10.923,-25.034) AE11(11.923,-25.034) AE12(12.923,-25.034) AE13(13.923,-25.034) AE14(14.923,-25.034) AE15(15.923,-25.034) AE16(16.923,-25.034) AE17(17.923,-25.034) AE18(18.923,-25.034) AE19(19.923,-25.034) AE20(20.923,-25.034) AE21(21.923,-25.034) AE22(22.923,-25.034) AE23(23.923,-25.034) AE24(24.923,-25.034) AE25(25.923,-25.034) AE26(26.923,-25.034) AE27(27.923,-25.034) AE28(28.923,-25.034) AE29(29.923,-25.034) AE30(30.923,-25.034) AF1(1.923,-26.034) AF2(2.923,-26.034) AF3(3.923,-26.034) AF4(4.923,-26.034) AF5(5.923,-26.034) AF6(6.923,-26.034) AF7(7.923,-26.034) AF8(8.923,-26.034) AF9(9.923,-26.034) AF10(10.923,-26.034) AF11(11.923,-26.034) AF12(12.923,-26.034) AF13(13.923,-26.034) AF14(14.923,-26.034) AF15(15.923,-26.034) AF16(16.923,-26.034) AF17(17.923,-26.034) AF18(18.923,-26.034) AF19(19.923,-26.034) AF20(20.923,-26.034) AF21(21.923,-26.034) AF22(22.923,-26.034) AF23(23.923,-26.034) AF24(24.923,-26.034) AF25(25.923,-26.034) AF26(26.923,-26.034) AF27(27.923,-26.034) AF28(28.923,-26.034) AF29(29.923,-26.034) AF30(30.923,-26.034) AG1(1.923,-27.034) AG2(2.923,-27.034) AG3(3.923,-27.034) AG4(4.923,-27.034) AG5(5.923,-27.034) AG6(6.923,-27.034) AG7(7.923,-27.034) AG8(8.923,-27.034) AG9(9.923,-27.034) AG10(10.923,-27.034) AG11(11.923,-27.034) AG12(12.923,-27.034) AG13(13.923,-27.034) AG14(14.923,-27.034) AG15(15.923,-27.034) AG16(16.923,-27.034) AG17(17.923,-27.034) AG18(18.923,-27.034) AG19(19.923,-27.034) AG20(20.923,-27.034) AG21(21.923,-27.034) AG22(22.923,-27.034) AG23(23.923,-27.034) AG24(24.923,-27.034) AG25(25.923,-27.034) AG26(26.923,-27.034) AG27(27.923,-27.034) AG28(28.923,-27.034) AG29(29.923,-27.034) AG30(30.923,-27.034) AH1(1.923,-28.034) AH2(2.923,-28.034) AH3(3.923,-28.034) AH4(4.923,-28.034) AH5(5.923,-28.034) AH6(6.923,-28.034) AH7(7.923,-28.034) AH8(8.923,-28.034) AH9(9.923,-28.034) AH10(10.923,-28.034) AH11(11.923,-28.034) AH12(12.923,-28.034) AH13(13.923,-28.034) AH14(14.923,-28.034) AH15(15.923,-28.034) AH16(16.923,-28.034) AH17(17.923,-28.034) AH18(18.923,-28.034) AH19(19.923,-28.034) AH20(20.923,-28.034) AH21(21.923,-28.034) AH22(22.923,-28.034) AH23(23.923,-28.034) AH24(24.923,-28.034) AH25(25.923,-28.034) AH26(26.923,-28.034) AH27(27.923,-28.034) AH28(28.923,-28.034) AH29(29.923,-28.034) AH30(30.923,-28.034) AJ1(1.923,-29.034) AJ2(2.923,-29.034) AJ3(3.923,-29.034) AJ4(4.923,-29.034) AJ5(5.923,-29.034) AJ6(6.923,-29.034) AJ7(7.923,-29.034) AJ8(8.923,-29.034) AJ9(9.923,-29.034) AJ10(10.923,-29.034) AJ11(11.923,-29.034) AJ12(12.923,-29.034) AJ13(13.923,-29.034) AJ14(14.923,-29.034) AJ15(15.923,-29.034) AJ16(16.923,-29.034) AJ17(17.923,-29.034) AJ18(18.923,-29.034) AJ19(19.923,-29.034) AJ20(20.923,-29.034) AJ21(21.923,-29.034) AJ22(22.923,-29.034) AJ23(23.923,-29.034) AJ24(24.923,-29.034) AJ25(25.923,-29.034) AJ26(26.923,-29.034) AJ27(27.923,-29.034) AJ28(28.923,-29.034) AJ29(29.923,-29.034) AJ30(30.923,-29.034) AK1(1.923,-30.034) AK2(2.923,-30.034) AK3(3.923,-30.034) AK4(4.923,-30.034) AK5(5.923,-30.034) AK6(6.923,-30.034) AK7(7.923,-30.034) AK8(8.923,-30.034) AK9(9.923,-30.034) AK10(10.923,-30.034) AK11(11.923,-30.034) AK12(12.923,-30.034) AK13(13.923,-30.034) AK14(14.923,-30.034) AK15(15.923,-30.034) AK16(16.923,-30.034) AK17(17.923,-30.034) AK18(18.923,-30.034) AK19(19.923,-30.034) AK20(20.923,-30.034) AK21(21.923,-30.034) AK22(22.923,-30.034) AK23(23.923,-30.034) AK24(24.923,-30.034) AK25(25.923,-30.034) AK26(26.923,-30.034) AK27(27.923,-30.034) AK28(28.923,-30.034) AK29(29.923,-30.034) AK30(30.923,-30.034) B1(1.923,-2.034) B2(2.923,-2.034) B3(3.923,-2.034) B4(4.923,-2.034) B5(5.923,-2.034) B6(6.923,-2.034) B7(7.923,-2.034) B8(8.923,-2.034) B9(9.923,-2.034) B10(10.923,-2.034) B11(11.923,-2.034) B12(12.923,-2.034) B13(13.923,-2.034) B14(14.923,-2.034) B15(15.923,-2.034) B16(16.923,-2.034) B17(17.923,-2.034) B18(18.923,-2.034) B19(19.923,-2.034) B20(20.923,-2.034) B21(21.923,-2.034) B22(22.923,-2.034) B23(23.923,-2.034) B24(24.923,-2.034) B25(25.923,-2.034) B26(26.923,-2.034) B27(27.923,-2.034) B28(28.923,-2.034) B29(29.923,-2.034) B30(30.923,-2.034) C1(1.923,-3.034) C2(2.923,-3.034) C3(3.923,-3.034) C4(4.923,-3.034) C5(5.923,-3.034) C6(6.923,-3.034) C7(7.923,-3.034) C8(8.923,-3.034) C9(9.923,-3.034) C10(10.923,-3.034) C11(11.923,-3.034) C12(12.923,-3.034) C13(13.923,-3.034) C14(14.923,-3.034) C15(15.923,-3.034) C16(16.923,-3.034) C17(17.923,-3.034) C18(18.923,-3.034) C19(19.923,-3.034) C20(20.923,-3.034) C21(21.923,-3.034) C22(22.923,-3.034) C23(23.923,-3.034) C24(24.923,-3.034) C25(25.923,-3.034) C26(26.923,-3.034) C27(27.923,-3.034) C28(28.923,-3.034) C29(29.923,-3.034) C30(30.923,-3.034) D1(1.923,-4.034) D2(2.923,-4.034) D3(3.923,-4.034) D4(4.923,-4.034) D5(5.923,-4.034) D6(6.923,-4.034) D7(7.923,-4.034) D8(8.923,-4.034) D9(9.923,-4.034) D10(10.923,-4.034) D11(11.923,-4.034) D12(12.923,-4.034) D13(13.923,-4.034) D14(14.923,-4.034) D15(15.923,-4.034) D16(16.923,-4.034) D17(17.923,-4.034) D18(18.923,-4.034) D19(19.923,-4.034) D20(20.923,-4.034) D21(21.923,-4.034) D22(22.923,-4.034) D23(23.923,-4.034) D24(24.923,-4.034) D25(25.923,-4.034) D26(26.923,-4.034) D27(27.923,-4.034) D28(28.923,-4.034) D29(29.923,-4.034) D30(30.923,-4.034) E1(1.923,-5.034) E2(2.923,-5.034) E3(3.923,-5.034) E4(4.923,-5.034) E5(5.923,-5.034) E6(6.923,-5.034) E7(7.923,-5.034) E8(8.923,-5.034) E9(9.923,-5.034) E10(10.923,-5.034) E11(11.923,-5.034) E12(12.923,-5.034) E13(13.923,-5.034) E14(14.923,-5.034) E15(15.923,-5.034) E16(16.923,-5.034) E17(17.923,-5.034) E18(18.923,-5.034) E19(19.923,-5.034) E20(20.923,-5.034) E21(21.923,-5.034) E22(22.923,-5.034) E23(23.923,-5.034) E24(24.923,-5.034) E25(25.923,-5.034) E26(26.923,-5.034) E27(27.923,-5.034) E28(28.923,-5.034) E29(29.923,-5.034) E30(30.923,-5.034) F1(1.923,-6.034) F2(2.923,-6.034) F3(3.923,-6.034) F4(4.923,-6.034) F5(5.923,-6.034) F6(6.923,-6.034) F7(7.923,-6.034) F8(8.923,-6.034) F9(9.923,-6.034) F10(10.923,-6.034) F11(11.923,-6.034) F12(12.923,-6.034) F13(13.923,-6.034) F14(14.923,-6.034) F15(15.923,-6.034) F16(16.923,-6.034) F17(17.923,-6.034) F18(18.923,-6.034) F19(19.923,-6.034) F20(20.923,-6.034) F21(21.923,-6.034) F22(22.923,-6.034) F23(23.923,-6.034) F24(24.923,-6.034) F25(25.923,-6.034) F26(26.923,-6.034) F27(27.923,-6.034) F28(28.923,-6.034) F29(29.923,-6.034) F30(30.923,-6.034) G1(1.923,-7.034) G2(2.923,-7.034) G3(3.923,-7.034) G4(4.923,-7.034) G5(5.923,-7.034) G6(6.923,-7.034) G7(7.923,-7.034) G8(8.923,-7.034) G9(9.923,-7.034) G10(10.923,-7.034) G11(11.923,-7.034) G12(12.923,-7.034) G13(13.923,-7.034) G14(14.923,-7.034) G15(15.923,-7.034) G16(16.923,-7.034) G17(17.923,-7.034) G18(18.923,-7.034) G19(19.923,-7.034) G20(20.923,-7.034) G21(21.923,-7.034) G22(22.923,-7.034) G23(23.923,-7.034) G24(24.923,-7.034) G25(25.923,-7.034) G26(26.923,-7.034) G27(27.923,-7.034) G28(28.923,-7.034) G29(29.923,-7.034) G30(30.923,-7.034) H1(1.923,-8.034) H2(2.923,-8.034) H3(3.923,-8.034) H4(4.923,-8.034) H5(5.923,-8.034) H6(6.923,-8.034) H7(7.923,-8.034) H8(8.923,-8.034) H9(9.923,-8.034) H10(10.923,-8.034) H11(11.923,-8.034) H12(12.923,-8.034) H13(13.923,-8.034) H14(14.923,-8.034) H15(15.923,-8.034) H16(16.923,-8.034) H17(17.923,-8.034) H18(18.923,-8.034) H19(19.923,-8.034) H20(20.923,-8.034) H21(21.923,-8.034) H22(22.923,-8.034) H23(23.923,-8.034) H24(24.923,-8.034) H25(25.923,-8.034) H26(26.923,-8.034) H27(27.923,-8.034) H28(28.923,-8.034) H29(29.923,-8.034) H30(30.923,-8.034) J1(1.923,-9.034) J2(2.923,-9.034) J3(3.923,-9.034) J4(4.923,-9.034) J5(5.923,-9.034) J6(6.923,-9.034) J7(7.923,-9.034) J8(8.923,-9.034) J9(9.923,-9.034) J10(10.923,-9.034) J11(11.923,-9.034) J12(12.923,-9.034) J13(13.923,-9.034) J14(14.923,-9.034) J15(15.923,-9.034) J16(16.923,-9.034) J17(17.923,-9.034) J18(18.923,-9.034) J19(19.923,-9.034) J20(20.923,-9.034) J21(21.923,-9.034) J22(22.923,-9.034) J23(23.923,-9.034) J24(24.923,-9.034) J25(25.923,-9.034) J26(26.923,-9.034) J27(27.923,-9.034) J28(28.923,-9.034) J29(29.923,-9.034) J30(30.923,-9.034) K1(1.923,-10.034) K2(2.923,-10.034) K3(3.923,-10.034) K4(4.923,-10.034) K5(5.923,-10.034) K6(6.923,-10.034) K7(7.923,-10.034) K8(8.923,-10.034) K9(9.923,-10.034) K10(10.923,-10.034) K11(11.923,-10.034) K12(12.923,-10.034) K13(13.923,-10.034) K14(14.923,-10.034) K15(15.923,-10.034) K16(16.923,-10.034) K17(17.923,-10.034) K18(18.923,-10.034) K19(19.923,-10.034) K20(20.923,-10.034) K21(21.923,-10.034) K22(22.923,-10.034) K23(23.923,-10.034) K24(24.923,-10.034) K25(25.923,-10.034) K26(26.923,-10.034) K27(27.923,-10.034) K28(28.923,-10.034) K29(29.923,-10.034) K30(30.923,-10.034) L1(1.923,-11.034) L2(2.923,-11.034) L3(3.923,-11.034) L4(4.923,-11.034) L5(5.923,-11.034) L6(6.923,-11.034) L7(7.923,-11.034) L8(8.923,-11.034) L9(9.923,-11.034) L10(10.923,-11.034) L11(11.923,-11.034) L12(12.923,-11.034) L13(13.923,-11.034) L14(14.923,-11.034) L15(15.923,-11.034) L16(16.923,-11.034) L17(17.923,-11.034) L18(18.923,-11.034) L19(19.923,-11.034) L20(20.923,-11.034) L21(21.923,-11.034) L22(22.923,-11.034) L23(23.923,-11.034) L24(24.923,-11.034) L25(25.923,-11.034) L26(26.923,-11.034) L27(27.923,-11.034) L28(28.923,-11.034) L29(29.923,-11.034) L30(30.923,-11.034) M1(1.923,-12.034) M2(2.923,-12.034) M3(3.923,-12.034) M4(4.923,-12.034) M5(5.923,-12.034) M6(6.923,-12.034) M7(7.923,-12.034) M8(8.923,-12.034) M9(9.923,-12.034) M10(10.923,-12.034) M11(11.923,-12.034) M12(12.923,-12.034) M13(13.923,-12.034) M14(14.923,-12.034) M15(15.923,-12.034) M16(16.923,-12.034) M17(17.923,-12.034) M18(18.923,-12.034) M19(19.923,-12.034) M20(20.923,-12.034) M21(21.923,-12.034) M22(22.923,-12.034) M23(23.923,-12.034) M24(24.923,-12.034) M25(25.923,-12.034) M26(26.923,-12.034) M27(27.923,-12.034) M28(28.923,-12.034) M29(29.923,-12.034) M30(30.923,-12.034) N1(1.923,-13.034) N2(2.923,-13.034) N3(3.923,-13.034) N4(4.923,-13.034) N5(5.923,-13.034) N6(6.923,-13.034) N7(7.923,-13.034) N8(8.923,-13.034) N9(9.923,-13.034) N10(10.923,-13.034) N11(11.923,-13.034) N12(12.923,-13.034) N13(13.923,-13.034) N14(14.923,-13.034) N15(15.923,-13.034) N16(16.923,-13.034) N17(17.923,-13.034) N18(18.923,-13.034) N19(19.923,-13.034) N20(20.923,-13.034) N21(21.923,-13.034) N22(22.923,-13.034) N23(23.923,-13.034) N24(24.923,-13.034) N25(25.923,-13.034) N26(26.923,-13.034) N27(27.923,-13.034) N28(28.923,-13.034) N29(29.923,-13.034) N30(30.923,-13.034) P1(1.923,-14.034) P2(2.923,-14.034) P3(3.923,-14.034) P4(4.923,-14.034) P5(5.923,-14.034) P6(6.923,-14.034) P7(7.923,-14.034) P8(8.923,-14.034) P9(9.923,-14.034) P10(10.923,-14.034) P11(11.923,-14.034) P12(12.923,-14.034) P13(13.923,-14.034) P14(14.923,-14.034) P15(15.923,-14.034) P16(16.923,-14.034) P17(17.923,-14.034) P18(18.923,-14.034) P19(19.923,-14.034) P20(20.923,-14.034) P21(21.923,-14.034) P22(22.923,-14.034) P23(23.923,-14.034) P24(24.923,-14.034) P25(25.923,-14.034) P26(26.923,-14.034) P27(27.923,-14.034) P28(28.923,-14.034) P29(29.923,-14.034) P30(30.923,-14.034) R1(1.923,-15.034) R2(2.923,-15.034) R3(3.923,-15.034) R4(4.923,-15.034) R5(5.923,-15.034) R6(6.923,-15.034) R7(7.923,-15.034) R8(8.923,-15.034) R9(9.923,-15.034) R10(10.923,-15.034) R11(11.923,-15.034) R12(12.923,-15.034) R13(13.923,-15.034) R14(14.923,-15.034) R15(15.923,-15.034) R16(16.923,-15.034) R17(17.923,-15.034) R18(18.923,-15.034) R19(19.923,-15.034) R20(20.923,-15.034) R21(21.923,-15.034) R22(22.923,-15.034) R23(23.923,-15.034) R24(24.923,-15.034) R25(25.923,-15.034) R26(26.923,-15.034) R27(27.923,-15.034) R28(28.923,-15.034) R29(29.923,-15.034) R30(30.923,-15.034) T1(1.923,-16.034) T2(2.923,-16.034) T3(3.923,-16.034) T4(4.923,-16.034) T5(5.923,-16.034) T6(6.923,-16.034) T7(7.923,-16.034) T8(8.923,-16.034) T9(9.923,-16.034) T10(10.923,-16.034) T11(11.923,-16.034) T12(12.923,-16.034) T13(13.923,-16.034) T14(14.923,-16.034) T15(15.923,-16.034) T16(16.923,-16.034) T17(17.923,-16.034) T18(18.923,-16.034) T19(19.923,-16.034) T20(20.923,-16.034) T21(21.923,-16.034) T22(22.923,-16.034) T23(23.923,-16.034) T24(24.923,-16.034) T25(25.923,-16.034) T26(26.923,-16.034) T27(27.923,-16.034) T28(28.923,-16.034) T29(29.923,-16.034) T30(30.923,-16.034) U1(1.923,-17.034) U2(2.923,-17.034) U3(3.923,-17.034) U4(4.923,-17.034) U5(5.923,-17.034) U6(6.923,-17.034) U7(7.923,-17.034) U8(8.923,-17.034) U9(9.923,-17.034) U10(10.923,-17.034) U11(11.923,-17.034) U12(12.923,-17.034) U13(13.923,-17.034) U14(14.923,-17.034) U15(15.923,-17.034) U16(16.923,-17.034) U17(17.923,-17.034) U18(18.923,-17.034) U19(19.923,-17.034) U20(20.923,-17.034) U21(21.923,-17.034) U22(22.923,-17.034) U23(23.923,-17.034) U24(24.923,-17.034) U25(25.923,-17.034) U26(26.923,-17.034) U27(27.923,-17.034) U28(28.923,-17.034) U29(29.923,-17.034) U30(30.923,-17.034) V1(1.923,-18.034) V2(2.923,-18.034) V3(3.923,-18.034) V4(4.923,-18.034) V5(5.923,-18.034) V6(6.923,-18.034) V7(7.923,-18.034) V8(8.923,-18.034) V9(9.923,-18.034) V10(10.923,-18.034) V11(11.923,-18.034) V12(12.923,-18.034) V13(13.923,-18.034) V14(14.923,-18.034) V15(15.923,-18.034) V16(16.923,-18.034) V17(17.923,-18.034) V18(18.923,-18.034) V19(19.923,-18.034) V20(20.923,-18.034) V21(21.923,-18.034) V22(22.923,-18.034) V23(23.923,-18.034) V24(24.923,-18.034) V25(25.923,-18.034) V26(26.923,-18.034) V27(27.923,-18.034) V28(28.923,-18.034) V29(29.923,-18.034) V30(30.923,-18.034) W1(1.923,-19.034) W2(2.923,-19.034) W3(3.923,-19.034) W4(4.923,-19.034) W5(5.923,-19.034) W6(6.923,-19.034) W7(7.923,-19.034) W8(8.923,-19.034) W9(9.923,-19.034) W10(10.923,-19.034) W11(11.923,-19.034) W12(12.923,-19.034) W13(13.923,-19.034) W14(14.923,-19.034) W15(15.923,-19.034) W16(16.923,-19.034) W17(17.923,-19.034) W18(18.923,-19.034) W19(19.923,-19.034) W20(20.923,-19.034) W21(21.923,-19.034) W22(22.923,-19.034) W23(23.923,-19.034) W24(24.923,-19.034) W25(25.923,-19.034) W26(26.923,-19.034) W27(27.923,-19.034) W28(28.923,-19.034) W29(29.923,-19.034) W30(30.923,-19.034) Y1(1.923,-20.034) Y2(2.923,-20.034) Y3(3.923,-20.034) Y4(4.923,-20.034) Y5(5.923,-20.034) Y6(6.923,-20.034) Y7(7.923,-20.034) Y8(8.923,-20.034) Y9(9.923,-20.034) Y10(10.923,-20.034) Y11(11.923,-20.034) Y12(12.923,-20.034) Y13(13.923,-20.034) Y14(14.923,-20.034) Y15(15.923,-20.034) Y16(16.923,-20.034) Y17(17.923,-20.034) Y18(18.923,-20.034) Y19(19.923,-20.034) Y20(20.923,-20.034) Y21(21.923,-20.034) Y22(22.923,-20.034) Y23(23.923,-20.034) Y24(24.923,-20.034) Y25(25.923,-20.034) Y26(26.923,-20.034) Y27(27.923,-20.034) Y28(28.923,-20.034) Y29(29.923,-20.034) Y30(30.923,-20.034)
  silkscreen extent 0.15,-31.03 31.92,-0.03
HDR2X15_CEN [mm] "Connector; Header; 15x2 Position"
  rect 1.5x1.5 hole 0.9: 1(0,0)
  round 1.5 hole 0.9: 2(2.54,0) 3(5.08,0) 4(7.62,0) 5(10.16,0) 6(12.7,0) 7(15.24,0) 8(17.78,0) 9(20.32,0) 10(22.86,0) 11(25.4,0) 12(27.94,0) 13(30.48,0) 14(33.02,0) 15(35.56,0) 16(0,2.54) 17(2.54,2.54) 18(5.08,2.54) 19(7.62,2.54) 20(10.16,2.54) 21(12.7,2.54) 22(15.24,2.54) 23(17.78,2.54) 24(20.32,2.54) 25(22.86,2.54) 26(25.4,2.54) 27(27.94,2.54) 28(30.48,2.54) 29(33.02,2.54) 30(35.56,2.54)
  silkscreen extent -1.27,-1.27 36.83,3.81
HDR2X20 [mm] "Connector; Header; 20x2 Position"
  rect 1.5x1.5 hole 0.9: 1(0,0)
  round 1.5 hole 0.9: 2(0,2.54) 3(2.54,0) 4(2.54,2.54) 5(5.08,0) 6(5.08,2.54) 7(7.62,0) 8(7.62,2.54) 9(10.16,0) 10(10.16,2.54) 11(12.7,0) 12(12.7,2.54) 13(15.24,0) 14(15.24,2.54) 15(17.78,0) 16(17.78,2.54) 17(20.32,0) 18(20.32,2.54) 19(22.86,0) 20(22.86,2.54) 21(25.4,0) 22(25.4,2.54) 23(27.94,0) 24(27.94,2.54) 25(30.48,0) 26(30.48,2.54) 27(33.02,0) 28(33.02,2.54) 29(35.56,0) 30(35.56,2.54) 31(38.1,0) 32(38.1,2.54) 33(40.64,0) 34(40.64,2.54) 35(43.18,0) 36(43.18,2.54) 37(45.72,0) 38(45.72,2.54) 39(48.26,0) 40(48.26,2.54)
  silkscreen extent -1.27,-1.27 49.53,3.81
J1-0603 [mm] "Chip Resistor, Body 1.6x0.8mm, IPC High Density"
  rect 0.7x0.9 smd: 1(-0.75,0) 2(0.75,0)
  silkscreen extent -0.2,-0.35 0.2,0.35, body extent -0.85,-0.48 0.85,0.48, height 0.9
JTAG-10 [mm] "JTAG-10"
  rect 1.73x1.73 hole 0.89: 1(-5.08,-1.27)
  round 1.73 hole 0.89: 2(-5.08,1.27) 3(-2.54,-1.27) 4(-2.54,1.27) 5(0,-1.27) 6(0,1.27) 7(2.54,-1.27) 8(2.54,1.27) 9(5.08,-1.27) 10(5.08,1.27)
  silkscreen extent -10.16,-3.81 10.16,3.81
MICRO_SD [mil] "MICRO_SD"
  rect 27.56x70.87 smd: 1(92,280.5) 2(48.69,280.5) 3(5.39,280.5) 4(-37.92,280.5) 5(-81.23,280.5) 6(-124.54,280.5) 7(-167.84,280.5) 8(-211.15,280.5) 9(-254.46,280.5)
  rect 62.99x59.06 smd: 10(273.1,235.22)
  rect 47.24x70.87 smd: 11(-301.7,225.38) 12(-301.7,-148.63) 13(308.54,-148.63)
  Keep-Out Layer circle w1: c123.5,-156.51 r19.64
  Keep-Out Layer circle w1: c-191.46,-156.51 r19.64
  Multi-Layer keep-out circle w1: c-191.46,-156.51 r29.64
  Multi-Layer keep-out circle w1: c123.5,-156.51 r29.64
  silkscreen extent -302,-314 302,344, body extent -342,-327 342,327, height 150
OSC6-5X7 [mil] "OSC6-5X7"
  rect 80x72 smd: 1(-101,-82) 2(-1,-82) 3(99,-82) 4(99,85) 5(-1,85) 6(-101,85)
  silkscreen extent -153,-164 151,131, body extent -158,-135 158,135, height 150
QFN24_RTW [mm] "QFN24_RTW"
  oval 1x0.25 smd: 1(-2,1.169) 2(-2,0.67) 3(-2,0.169) 4(-2,-0.33) 5(-2,-0.831) 6(-2,-1.33) 13(2,-1.33) 14(2,-0.831) 15(2,-0.33) 16(2,0.169) 17(2,0.67) 18(2,1.169)
  oval 0.25x1 smd: 7(-1.25,-2.081) 8(-0.75,-2.081) 9(-0.25,-2.081) 10(0.25,-2.081) 11(0.75,-2.081) 12(1.25,-2.081) 19(1.25,1.919) 20(0.75,1.919) 21(0.25,1.919) 22(-0.25,1.919) 23(-0.75,1.919) 24(-1.25,1.919)
  rect 2.45x2.45 smd: 25(0,-0.081)
  silkscreen extent -3.15,1.06 -1.52,2.21
SOT-23 [mil] "SOT-23"
  rect 55x40 smd: 1(37.3,-38.83) 2(37.3,35.98) 3(-41.09,-1.43)
  silkscreen extent -51,-58 -6,57, body extent -72,-62 72,62, height 150
WSON-8_L6.0-W8.0-P1.27-BL-EP [mm]
  rect 0.5x1 smd: 1(-1.92,-3.8) 2(-0.64,-3.8) 3(0.64,-3.8) 4(1.92,-3.8) 5(1.92,3.8) 6(0.64,3.8) 7(-0.64,3.8) 8(-1.92,3.8)
  rect 4.3x3.4 smd: 9(0,0)
  silkscreen extent -3,-4.7 3,4

## Part data
C1 C2 C3 C4 C5 C6 C7 C8 C9 C10 C11 C12 C13 C14 C15 C16 C17 C18 C19 C20 C21 C22 C23 C24 C25 C26 C27 C28 C29 C30 C31 C32 C33 C34 C35 C36 C37 C38 C39 C40 C41 C42 C43 C44 C45 C46 C47 C48 C49 C50 C51 C52 C53 C54 C55 C56 C57 C58 C59 C60 C61 C62 C63 C64 C65 C66 C67 C68 C69 C70 C71 C72 C73 C74 C75 C76 C79 C80 C81 C82 C83 C84 C85 C86 C87 C88 C89 C90 C91 C92 C93 C94 C95 C96 C97 C98 C99 C?: "Capacitor (Semiconductor SIM Model)", LatestRevisionDate=29-May-2009, LatestRevisionNote="IPC-7351 Footprint Added.", PackageDescription="Chip Capacitor", PackageReference=C1206, Published=8-Jun-2000, Publisher="Altium Limited"
CARD1: BOM_Manufacturer=HRO, BOM_Manufacturer Part=TF-01A, BOM_Supplier=LCSC, BOM_Supplier Part=C91145, spicePre=C, spiceSymbolName=TF-01A
D5 D6: "Typical BLUE SiC LED", DatasheetVersion=16-Apr-2002, LatestRevisionDate=17-Dec-2003, LatestRevisionNote="PCB Footprint replaced.", PackageDescription="SM LED; 2 C-Bend Leads; Body 3.5 x 2.8 x 1.9 mm, inc leads (LxWxH typ)", PackageReference=3.5X2.8X1.9, PackageVersion=16-Apr-2002, Published=8-Jun-2000, Publisher="Altium Limited"
P1 P2: "Header, 15-Pin, Dual row", LatestRevisionDate=17-Jul-2002, LatestRevisionNote="Re-released for DXP Platform.", Publisher="Altium Limited"
P3 P4: "Header, 20-Pin, Dual row", LatestRevisionDate=17-Jul-2002, LatestRevisionNote="Re-released for DXP Platform.", Publisher="Altium Limited"
R1 R2 R3 R4 R5 R6 R7 R8 R9 R10 R11 R12 R13 R14 R15 R16 R17 R18 R19 R20 R21 R22: "Resistor", LatestRevisionDate=29-May-2009, LatestRevisionNote="IPC-7351 Footprint Added.", PackageDescription="Chip Resistor", PackageReference=J1-0603, Published=8-Jun-2000, Publisher="Altium Limited"
U3: BOM_Manufacturer="Texas Instruments", BOM_Manufacturer Part=TXS02612RTWR, BOM_Supplier=LCSC, BOM_Supplier Part=C140276, Contributor=LCSC, spicePre=U, spiceSymbolName=TXS02612RTWR
L1 L2 L3: Code_IEC=1005, Code_JEITA=0402, LatestRevisionDate=29-May-2009, LatestRevisionNote="IPC-7351 Footprint Added.", PackageDescription="Chip Inductor", PackageReference=0402-A, Published=8-Jun-2000, Publisher="Altium Limited"

## Free pads (board coordinates)
  round 6 hole 3.5: 3(98.196,42.469) 3(98.222,136.22) 3(191.973,42.545) 3(192.024,136.22)

## Via types
v1: diameter 0.406, hole 0.254, Top Layer to Bottom Layer, 401 vias

## Nets (pads, with @x,y where several pads share a name; then routed paths per layer and width w, separated by ;. In a path a pad name is that pad's centre, name@x,y a point inside that pad or via, vN(x,y) a via of type N, cw(c..) or ccw(c..) an arc to the next point about the centre after c; other vN are vias at no path point)
+1.0V: C32.2 C33.2 C34.2 C35.2 C36.2 C37.2 C38.2 C39.2 C40.2 C41.2 C42.2 C43.2 C48.2 C49.2 C50.2 C51.2 C52.2 C53.2 C54.2 C55.2 C56.2 C57.2 C58.2 C59.2 C60.2 C61.2 C62.2 C63.2 C64.2 C65.2 C66.2 C67.2 C68.2 P1.16 P1.17 P1.18 U1.M11 U1.M13 U1.M15 U1.M17 U1.N10 U1.N12 U1.N14 U1.N16 U1.N18 U1.P11 U1.P17 U1.R10 U1.R12 U1.R16 U1.R18 U1.T11 U1.T17 U1.U10 U1.U12 U1.U16 U1.U18 U1.V17 U1.W16 U1.W18 | length 39.9
  Top Layer w0.457: v1(137.109,93.828) 137.62,93.317 U1.M17@137.62,93.314 ; v1(137.135,86.817) 137.62,87.303 U1.M11@137.62,87.314 ; v1(137.135,88.798) 137.135,88.817 137.62,89.302 U1.M13@137.62,89.314 ; v1(137.16,90.83) 137.16,90.842 137.62,91.302 U1.M15@137.62,91.314 ; v1(138.1,92.837) 138.62,92.317 U1.N16@138.62,92.314 ; v1(138.125,87.782) 138.125,87.807 138.62,88.302 U1.N12@138.62,88.314 ; v1(138.125,89.814) 138.62,90.309 U1.N14@138.62,90.314 ; v1(138.151,85.801) 138.151,85.833 138.62,86.302 U1.N10@138.62,86.314 ; v1(138.151,94.793) 138.62,94.323 U1.N18@138.62,94.314 ; v1(139.141,86.792) 139.141,86.823 139.62,87.302 U1.P11@139.62,87.314 ; v1(139.167,93.802) 139.167,93.779 139.62,93.326 U1.P17@139.62,93.314 ; v1(140.132,85.801) 140.132,85.814 140.62,86.302 U1.R10@140.62,86.314 ; v1(140.132,87.782) 140.132,87.814 140.62,88.302 U1.R12@140.62,88.314 ; v1(140.132,92.812) 140.62,92.323 U1.R16@140.62,92.314 ; v1(140.157,94.793) 140.157,94.789 140.62,94.326 U1.R18@140.62,94.314 ; U1.T11@141.62,87.314 141.62,87.31 v1(142.138,86.792) ; U1.T17@141.62,93.314 141.625,93.314 v1(142.088,93.777) ; U1.U10@142.62,86.314 142.632,86.314 143.119,85.827 v1(143.129,85.827) ; U1.U12@142.62,88.314 142.632,88.314 143.112,87.833 v1(143.154,87.833) ; U1.U16@142.62,92.314 142.632,92.314 143.104,92.786 v1(143.129,92.786) ; U1.U18@142.62,94.314 142.632,94.314 143.111,94.793 v1(143.129,94.793) ; U1.V17@143.62,93.314 143.632,93.314 144.069,93.751 v1(144.12,93.751) ; U1.W16@144.62,92.314 144.632,92.314 145.129,92.812 v1(145.136,92.812) ; U1.W18@144.62,94.314 144.631,94.314 v1(145.11,94.793)
  Bottom Layer w0.406: v1@139.163,86.821 C49.2@139.598,87.257 ; C50.2@142.723,88.182 v1@143.042,87.862
  Bottom Layer w0.457: C58.2@135.611,86.792 C33.2@136.601,86.792 136.601,86.796 136.623,86.817 v1(137.135,86.817) ; C63.2@135.738,93.304 C53.2@136.627,93.304 136.627,93.354 137.101,93.828 v1(137.109,93.828) 137.171,93.766 137.247,93.766 137.566,93.446 C38.2@137.566,93.396 ; C32.2@136.627,88.773 136.627,88.777 136.648,88.798 v1(137.135,88.798) ; v1(137.16,90.83) 137.169,90.83 137.592,91.254 C41.2@137.592,91.304 ; C56.2@137.63,85.823 C56.2@137.643,85.836 137.643,85.823 137.664,85.801 v1(138.151,85.801) 138.637,85.801 138.659,85.823 C48.2@138.659,85.844 ; v1(138.1,92.837) C68.2@138.633,92.304 ; v1(138.125,87.782) C34.2@138.582,87.782 ; v1(138.125,89.814) 138.26,89.814 C64.2@138.557,90.111 ; C61.2@138.557,95.479 138.507,95.479 138.187,95.159 138.187,94.829 v1(138.151,94.793) 138.218,94.793 138.582,94.428 C37.2@138.582,94.378 ; v1(139.141,86.792) 139.163,86.813 v1@139.163,86.821 ; v1@139.163,93.789 139.212,93.74 139.279,93.74 139.598,93.42 C36.2@139.598,93.37 ; v1@140.114,92.794 140.462,92.446 C67.2@140.462,92.227 ; v1(140.132,85.801) 140.669,85.801 140.691,85.823 C57.2@140.691,85.836 ; v1(140.157,94.793) 140.157,95.189 140.472,95.504 C62.2@140.522,95.504 ; v1@140.179,87.83 140.228,87.879 140.295,87.879 140.614,88.199 C54.2@140.614,88.249 ; v1@140.179,94.793 140.182,94.793 140.564,94.411 C39.2@140.564,94.361 ; C35.2@141.529,93.378 141.529,93.428 141.849,93.748 142.059,93.748 v1(142.088,93.777) ; C55.2@141.554,87.249 141.554,87.199 141.576,87.178 141.753,87.178 v1(142.138,86.792) ; C66.2@142.672,92.227 142.672,92.329 v1(143.129,92.786) ; C40.2@142.672,94.37 142.672,94.42 143.044,94.793 v1(143.129,94.793) 143.129,95.106 143.451,95.428 C60.2@143.501,95.428 ; C50.2@142.723,88.182 C50.2@142.723,88.232 ; v1@143.126,87.862 v1(143.154,87.833) ; v1(143.129,85.827) 143.577,85.827 C51.2@143.586,85.836 ; C42.2@143.637,93.277 143.637,93.327 143.957,93.647 144.024,93.647 v1@144.124,93.747 ; C65.2@144.729,92.253 144.729,92.405 v1(145.136,92.812) ; v1(145.11,94.793) 145.271,94.793 145.618,94.446 C43.2@145.618,94.396 145.618,94.382 145.64,94.361 146.613,94.361 146.634,94.34 C52.2@146.634,94.32 146.638,94.324 147.494,94.324 C59.2@147.498,94.328
+1.5V: C84.2 C85.2 C86.2 C89.2 C90.2 C91.2 C97.2 C98.2 C99.2 P2.28 P2.29 P2.30 R17.2 U1.AA9 U1.AA19 U1.AB16 U1.AC3 U1.AC13 U1.AD10 U1.AE7 U1.AE17 U1.AF4 U1.AF14 U1.AG1 U1.AG11 U1.AH8 U1.AH18 U1.AJ5 U1.AJ15 U1.AK2 U1.AK12 U1.Y12 | length 38.1
  Top Layer w0.152: U1.AF14@151.62,90.314 U1.AF14@151.647,90.314
  Top Layer w0.457: U1.Y12@145.62,88.314 145.62,88.302 146.101,87.822 v1(146.101,87.757) ; U1.AA9@146.62,85.314 146.62,85.307 v1(147.117,84.811) ; U1.AA19@146.62,95.314 146.632,95.314 147.101,95.783 v1(147.142,95.783) ; U1.AB16@147.62,92.314 147.632,92.314 148.104,92.786 v1(148.133,92.786) ; U1.AC3@148.62,79.314 148.626,79.314 v1(149.123,78.816) ; U1.AC13@148.62,89.314 148.632,89.314 149.122,88.824 v1(149.123,88.824) ; U1.AD10@149.62,86.314 149.62,86.302 150.114,85.808 v1(150.114,85.801) ; U1.AE7@150.62,83.314 150.62,83.302 151.105,82.818 v1(151.105,82.779) ; U1.AE17@150.62,93.314 150.632,93.314 151.12,93.802 v1(151.13,93.802) ; U1.AF4@151.62,80.314 151.62,80.302 152.121,79.802 v1(152.121,79.781) ; U1.AF14@151.647,90.314 v1(152.146,89.814) ; U1.AG1@152.62,77.314 152.62,77.302 153.111,76.811 v1(153.111,76.733) ; U1.AG11@152.62,87.314 152.632,87.314 153.128,86.817 v1(153.137,86.817) ; U1.AH8@153.62,84.314 153.62,84.302 154.102,83.821 v1(154.102,83.769) ; U1.AH18@153.62,94.314 153.632,94.314 154.111,94.793 v1(154.127,94.793) ; U1.AJ5@154.62,81.314 154.62,81.302 155.118,80.805 v1(155.118,80.797) ; U1.AJ15@154.62,91.314 154.632,91.314 155.115,90.83 v1(155.143,90.83) ; U1.AK2@155.62,78.314 155.62,78.302 156.134,77.789 v1(156.134,77.775) ; U1.AK12@155.62,88.314 155.632,88.314 156.189,87.757 v1(156.21,87.757)
  Layer 2 w0.457: v1(148.133,92.786) 147.142,93.777 v1(147.142,95.783) 149.911,95.783 151.13,94.564 ; v1(151.13,93.802) 151.13,94.564 ; v1(155.143,90.83) 155.143,93.777 v1(154.127,94.793) 151.359,94.793 151.13,94.564
  Bottom Layer w0.457: v1(146.101,87.757) 146.413,87.445 147.021,87.445 R17.2@147.142,87.324 ; C85.2@146.634,85.293 146.634,85.243 146.954,84.923 147.021,84.923 v1@147.125,84.819 ; v1(148.133,92.786) 148.133,92.803 148.59,93.26 C91.2@148.59,93.31 ; v1(149.123,78.816) 149.236,78.703 149.236,78.628 149.556,78.308 C99.2@149.606,78.308 ; C89.2@150.622,83.312 150.672,83.312 151.105,82.879 v1(151.105,82.779) ; C86.2@151.536,90.322 151.586,90.322 152.094,89.814 v1(152.146,89.814) ; v1(152.121,79.781) 152.121,79.773 152.595,79.299 C98.2@152.645,79.299 ; C84.2@152.654,87.351 152.704,87.351 153.137,86.918 v1(153.137,86.817) ; C97.2@154.559,81.305 154.609,81.305 v1(155.118,80.797) ; C90.2@155.575,78.308 155.625,78.308 156.134,77.799 v1(156.134,77.775)
+1.8V: C25.2 C26.2 C27.2 C28.2 C29.2 C30.2 C31.2 C74.2 C75.2 L2.1 P1.19 P1.20 P1.21 U1.C10 U1.P13 U1.T13 U1.V11 U1.V13 U1.V15 U1.W10 U1.W12 U1.W14 | length 94.2
  Top Layer w0.457: v1(128.143,85.801) 128.143,85.825 128.62,86.302 U1.C10@128.62,86.314 ; v1(139.116,88.824) 139.118,88.824 139.608,89.314 U1.P13@139.62,89.314 ; U1.T13@141.62,89.314 141.623,89.314 v1(142.138,88.798) ; U1.V11@143.62,87.314 143.62,87.302 144.181,86.741 v1(144.221,86.741) ; U1.V13@143.62,89.314 143.62,89.302 144.12,88.803 v1(144.12,88.798) ; U1.V15@143.62,91.314 143.62,91.304 v1(144.145,90.78) ; U1.W10@144.62,86.314 144.632,86.314 145.094,85.852 v1(145.136,85.852) ; U1.W12@144.62,88.314 144.63,88.314 v1(145.136,87.808) ; U1.W14@144.62,90.314 144.62,90.304 v1(145.11,89.814)
  Layer 2 w0.406: v1(144.12,88.798) 145.11,89.789 v1(145.11,89.814) ; v1(144.145,90.78) v1(145.11,89.814) ; 145.948,94.92 145.948,94.361 145.618,94.031 145.618,93.218 146.253,92.583 146.253,90.957 v1(145.11,89.814)
  Layer 2 w0.762: 145.948,94.92 145.948,97.053 147.792,98.897 148.423,98.897 149.86,97.46 150.398,97.46 151.033,96.825 153.441,96.825 154.28,95.987 155.41,95.987 158.052,93.345 159.182,93.345 176.174,93.345 187.122,104.292 P1.20@189.84,104.292 ; P1.19@189.84,101.752 P1.20@189.84,104.292 ; P1.21@189.84,106.832 P1.20@189.84,104.292
  Bottom Layer w0.152: C25.2@128.626,86.268 128.626,86.275 128.664,86.275 131.075,86.275 133.07,88.27 138.562,88.27 v1(139.116,88.824)
  Bottom Layer w0.406: C30.2@141.621,89.332 141.671,89.332 142.016,88.987 142.016,88.921 v1(142.138,88.798) ; C26.2@143.662,89.256 v1(144.12,88.798) ; C31.2@143.688,91.364 143.738,91.364 144.098,91.003 144.098,90.826 v1(144.145,90.78) ; C29.2@144.653,90.272 v1(145.11,89.814)
  Bottom Layer w0.457: v1(128.143,85.801) 128.24,85.898 128.256,85.898 C25.2@128.626,86.268 ; C25.2@128.651,86.25 128.651,86.262 128.664,86.275 C25.2@128.672,86.284 ; v1@139.137,88.824 139.201,88.887 139.255,88.887 139.725,89.358 C75.2@139.725,89.408 139.743,89.391 140.622,89.391 L2.1@140.64,89.373 140.661,89.352 141.6,89.352 C30.2@141.613,89.34 ; C74.2@141.605,90.018 141.613,90.01 C30.2@141.613,89.34 ; C30.2@141.621,89.332 C30.2@141.613,89.34 ; C28.2@143.739,87.206 143.739,87.156 144.154,86.741 v1(144.221,86.741) ; C27.2@144.602,88.332 144.602,88.282 145.076,87.808 v1(145.136,87.808)